# Allegro board du_main_proto.brd
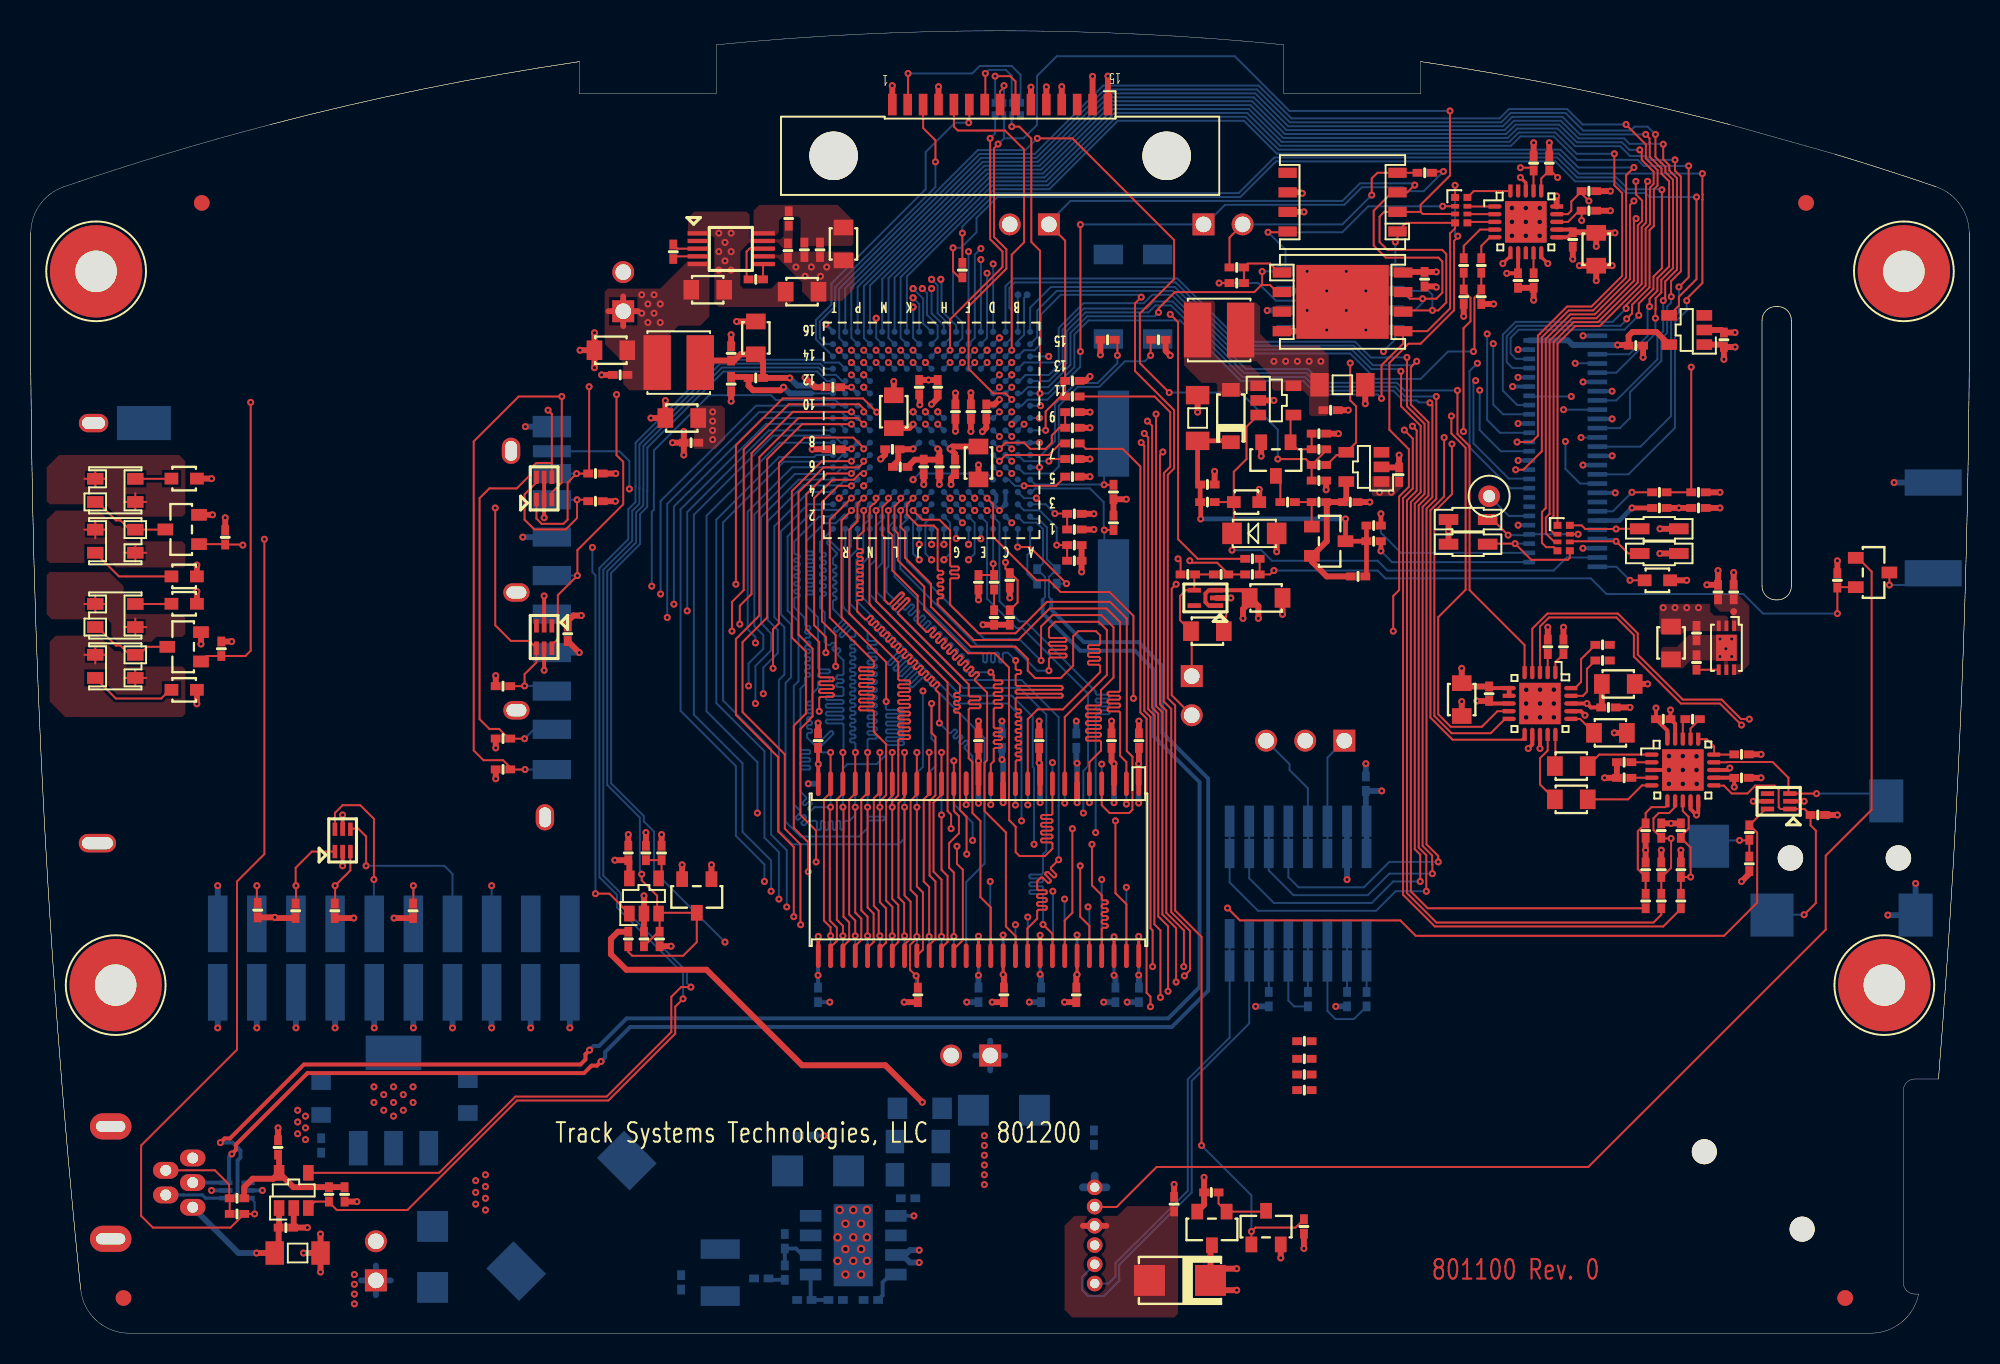
[diagram p0: board, top side]
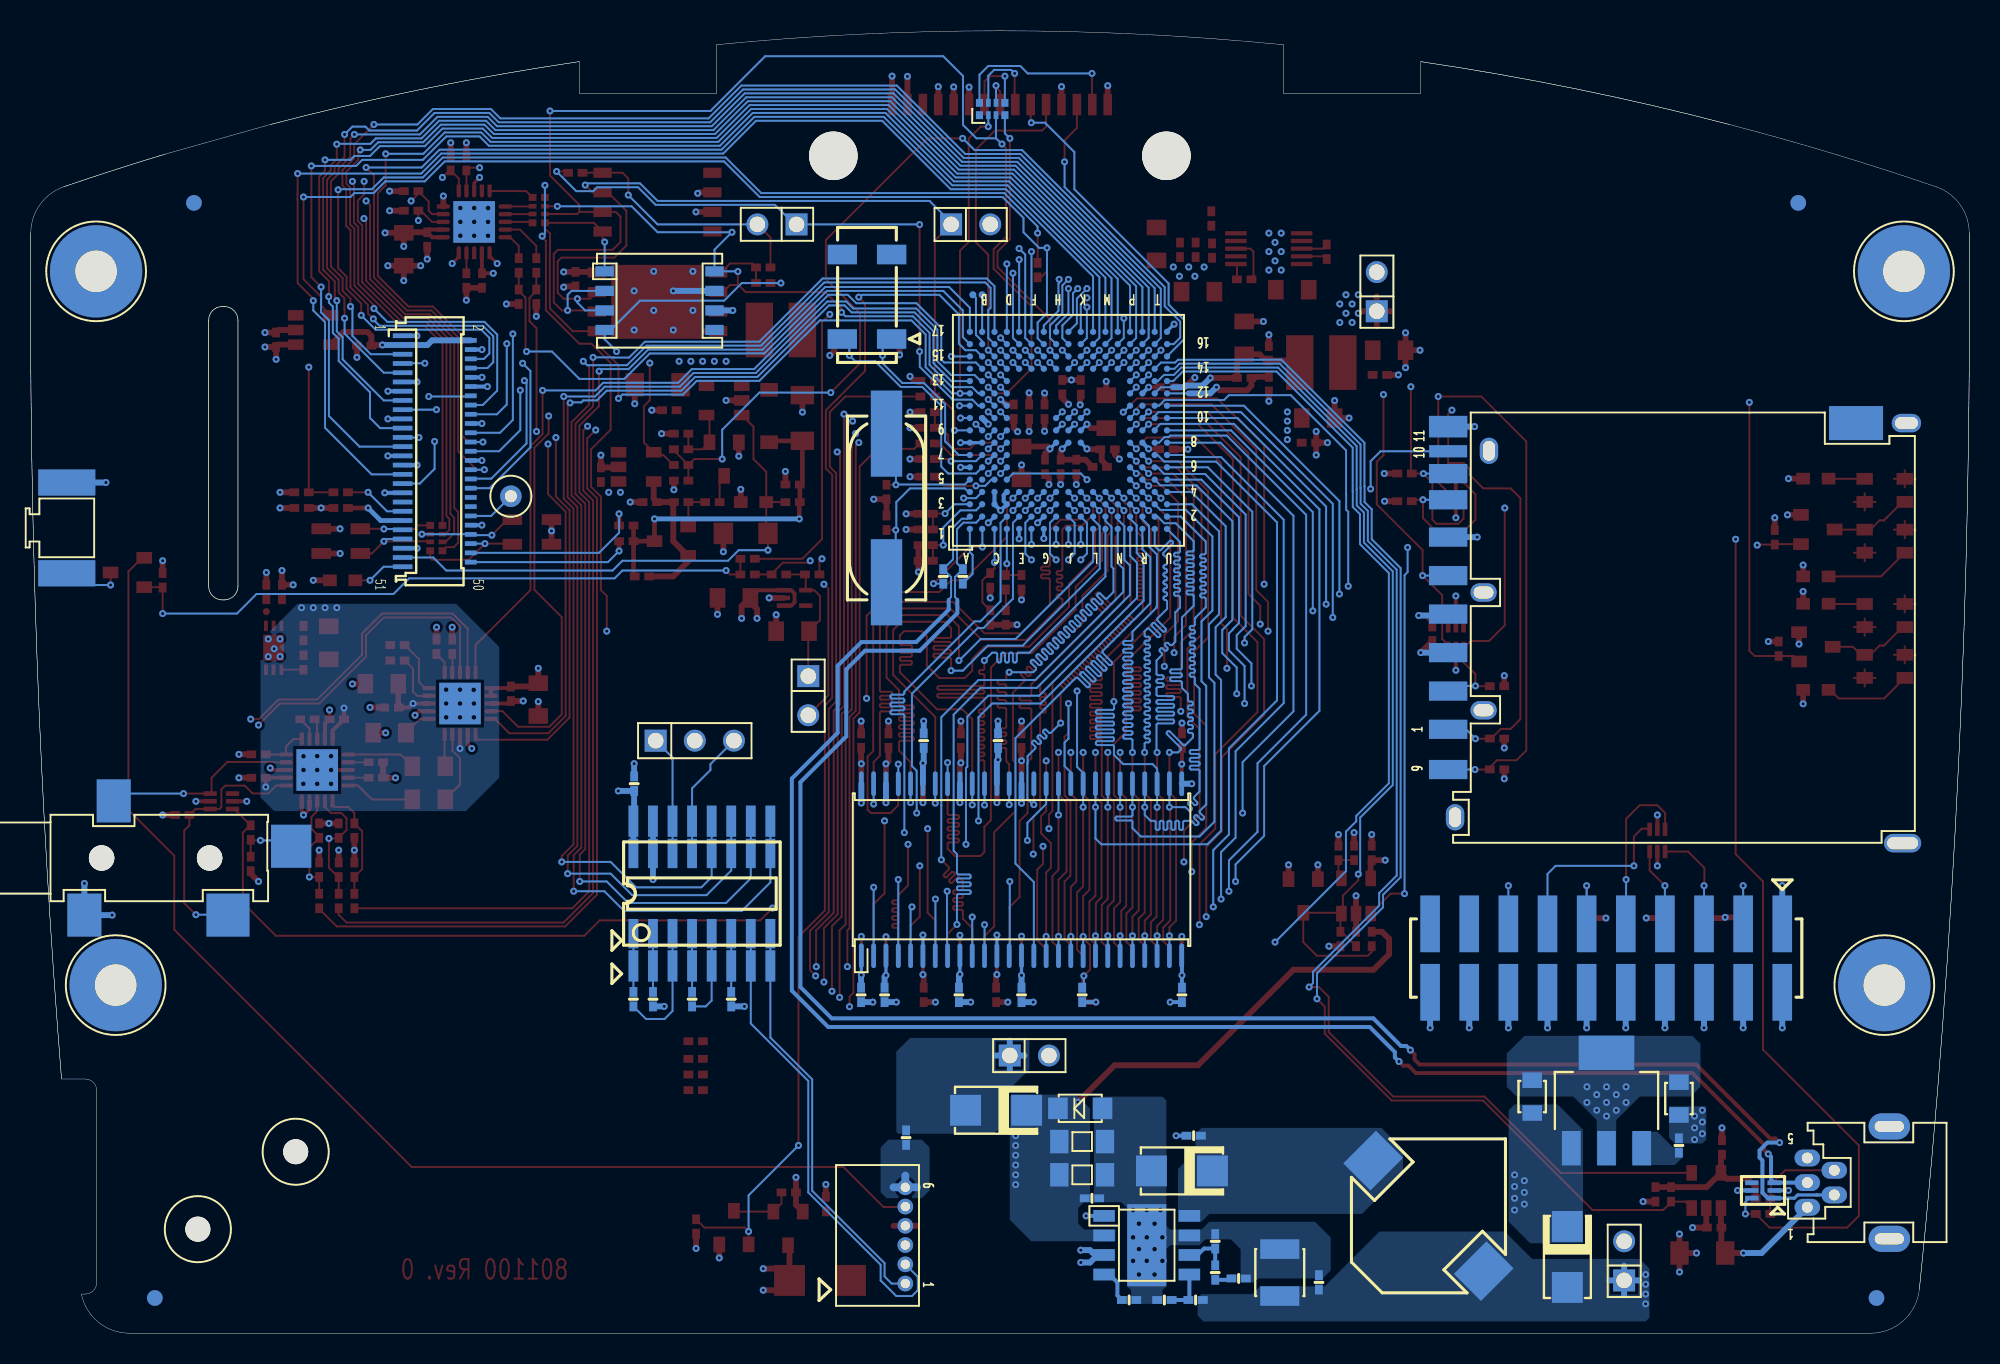
[diagram p1: board, bottom side, seen from below]

Outline 125.83 x 84.58 mm; copper layers: TOP, L2_GND, L3_PWR, L4_SIG, L5_GND, BOTTOM. Coordinates in mm from the lower left corner of the outline.
Outline path: 0,71.47 arc(0.6,73.3) 2.14,74.45 arc(5.4,75.54) 8.68,76.56 arc(12.1,77.56) 15.54,78.49 ; 0,71.47 arc(0.68,37.12) 3.23,2.85 ; 0,71.47 arc(0.68,37.12) 3.23,2.85 ; 3.23,2.85 arc(4.26,0.82) 6.39,0 119.43,0 arc(121.44,0.72) 122.54,2.54 122.31,2.54 arc(121.77,2.76) 121.55,3.3 121.55,15.75 arc(121.77,16.29) 122.31,16.51 123.83,16.51 ; 15.54,78.49 arc(25.52,80.81) 35.61,82.58 ; 15.54,78.49 arc(25.52,80.81) 35.61,82.58 ; 35.61,82.58 35.61,80.5 44.5,80.5 44.5,83.67 arc(62.91,84.58) 81.33,83.67 81.33,80.5 90.22,80.5 90.22,82.58 ; 90.22,82.58 arc(100.31,80.81) 110.28,78.49 ; 90.22,82.58 arc(100.31,80.81) 110.28,78.49 ; 110.28,78.49 117.14,76.56 ; 117.14,76.56 arc(120.42,75.54) 123.68,74.45 ; 117.14,76.56 arc(120.42,75.54) 123.68,74.45 ; 123.68,74.45 arc(125.23,73.3) 125.83,71.47 ; 125.83,71.47 arc(125.43,43.97) 123.83,16.51 ; 125.83,71.47 arc(125.43,43.97) 123.83,16.51 ; 112.38,65.79 112.38,48.51 arc(112.64,47.89) 113.27,47.62 113.4,47.62 arc(114.02,47.89) 114.28,48.51 114.28,65.79 arc(114.02,66.41) 113.4,66.68 113.27,66.68 arc(112.64,66.41) 112.38,65.79

## Design rules (mm)
net group USB: nets USB_DM USB_DP
net group DDR2_ADDR-CTRL: nets A2 A3 A4 A5 A6 A7 A8 A9 A10 A11 A13 A14 BA0 BA1 CAS RAS SDA10 SDCKE SDCS_NCS1 SDWE
net group DDR2_BYTE0: nets A0 D0 D1 D2 D3 D4 D5 D6 D7
net group DDR2_BYTE1: nets CFIOR_NBS1_NWR1 D8 D9 D10 D11 D12 D13 D14 D15
net group DDR2_BYTE2: nets A1 D16 D17 D18 D19 D20 D21 D22 D23
net group DDR2_BYTE3: nets CFIOW_NBS3_NWR3 D24 D25 D26 D27 D28 D29 D30 D31 SDCK

## Placement (name value [footprint] x y rotation side)
C1  0.1uF  [SMC_0402]  50.34 12.83 180 bottom
C2  1uF  [SMC_0402]  47.06 68.44 0 top
C3  1uF  [SMC_0402]  41.7 70.23 270 top
C4  10uF  [SMC_1206]  57.58 12.45 180 bottom
C5  0.1uF  [SMC_0402]  56.94 8.76 180 bottom
C6  10uF  [SMC_1206]  57.58 10.29 180 bottom
C7  100uF  [SMC_1210]  44.75 3.94 90 bottom
C8  0.1uF  [SMC_0402]  42.21 3.3 90 bottom
C9  0.01uF  [SMC_0402]  54.53 2.16 180 bottom
C10  10uF  [SMC_0805]  50.06 67.64 180 top
C11  10uF  [SMC_0805]  52.75 70.74 90 top
C12  10pF  [SMC_0402]  50.21 70.36 270 top
C13  0.1uF  [SMC_0402]  49.15 70.31 90 top
C14  10uF  [SMC_0805]  43.94 67.77 0 top
C15  10uF  [SMC_0805]  28.37 15.37 90 bottom
C16  10uF  [SMC_0805]  18.84 15.24 90 bottom
C17  47pF  [SMC_0402]  48.94 5.97 90 bottom
C18  680pF  [SMC_0402]  48.94 3.94 270 bottom
C19  0.1uF  [SMC_0402]  40.82 25.6 270 top
C20  0.1uF  [SMC_0402]  38.79 31.19 90 top
C21  0.1uF  [SMC_0402]  90.47 68.45 270 top
C22  0.01uF  [SMC_0402]  97.55 75.98 90 top
C23  0.01uF  [SMC_0402]  98.57 75.98 90 top
C24  0.01uF  [SMC_0402]  101.14 74.17 0 top
C25  10uF  [SMC_0805]  101.62 70.39 270 top
C26  1uF  [SMC_0402]  100.09 71.03 90 top
C27  0.01uF  [SMC_0402]  101.14 72.9 0 top
C28  1uF  [SMC_0402]  96.54 68.36 90 top
C29  0.1uF  [SMC_0402]  88.82 55.75 90 top
C30  0.1uF  [SMC_0402]  85.65 53.98 0 top
C31  0.1uF  [SMC_0402]  83.61 55.37 0 top
C32  0.1uF  [SMC_0402]  84.38 59.94 0 top
C33  10uF  [SMC_1206]  85.14 61.59 0 top
C34  10uF  [SMC_1206]  75.74 59.44 90 top
C35  0.1uF  [SMC_0402]  76.38 55.12 0 top
C36  DNP_22pF  [SMC_0402]  82.67 18.96 0 top
C37  DNP_390pF  [SMC_0402]  82.67 15.79 0 top
C38  0.1uF  [SMC_0402]  109.9 64.52 90 top
C39  0.1uF  [SMC_0402]  104.19 64.14 0 top
C40  0.1uF  [SMC_0402]  108.25 53.59 0 top
C41  0.1uF  [SMC_0402]  86.66 35.69 90 bottom
C42  0.1uF  [SMC_0402]  86.71 21.69 270 bottom
C43  0.1uF  [SMC_0402]  82.9 21.69 270 bottom
C44  0.1uF  [SMC_0402]  85.44 21.69 270 bottom
C45  0.1uF  [SMC_0402]  80.36 21.69 270 bottom
C46  0.1uF  [SMC_0402]  51.1 21.97 90 bottom
C47  0.1uF  [SMC_0402]  61.52 21.97 90 bottom
C48  0.1uF  [SMC_0402]  65.58 21.97 90 bottom
C49  0.1uF  [SMC_0402]  63.04 38.48 270 bottom
C50  0.1uF  [SMC_0402]  67.87 38.48 270 bottom
C51  0.1uF  [SMC_0402]  34.85 45.42 270 top
C52  0.1uF  [SMC_0402]  70.41 21.97 90 bottom
C53  0.1uF  [SMC_0402]  71.93 21.97 90 bottom
C54  0.1uF  [SMC_0402]  63.17 21.97 90 top
C55  0.1uF  [SMC_0402]  67.87 21.97 90 top
C56  0.1uF  [SMC_0402]  71.93 38.48 270 top
C57  0.1uF  [SMC_0402]  61.52 38.48 270 top
C58  0.1uF  [SMC_0402]  65.45 38.48 270 top
C59  0.1uF  [SMC_0402]  51.1 38.48 270 top
C60  0.1uF  [SMC_0402]  70.15 38.48 270 top
C61  0.1uF  [SMC_0402]  67.74 53.21 180 top
C62  0.1uF  [SMC_0402]  63.55 46.48 90 top
C63  10pF  [SMC_0402]  67.74 51.18 180 top
C64  4.7pF  [SMC_0402]  62.53 46.48 270 top
C65  470pF  [SMC_0402]  61.52 48.77 270 top
C66  18pF  [SMC_0402]  70.28 54.63 270 top
C67  18pF  [SMC_0402]  70.28 52.63 90 top
C68  DNP_18pF  [SMC_0402]  69.9 64.52 180 top
C69  0.1uF  [SMC_0402]  45.46 63.64 270 top
C70  DNP_18pF  [SMC_0402]  73.2 64.52 0 top
C71  0.1uF  [SMC_0402]  45.46 61.64 90 top
C72  10uF  [SMC_0805]  47.06 64.64 90 top
C73  0.1uF  [SMC_0402]  38.25 62.24 0 top
C74  10uF  [SMC_0805]  37.65 63.84 180 top
C75  0.1uF  [SMC_0402]  16.05 12.07 90 top
C76  DNP_10uF  [SMC_0805]  76.38 45.59 0 top
C77  0.1uF  [SMC_0402]  67.61 55.63 180 top
C78  10uF  [SMC_0805]  61.52 56.52 270 top
C79  0.1uF  [SMC_0402]  57.96 56.26 90 top
C80  0.1uF  [SMC_0402]  59.99 56.26 90 top
C81  0.1uF  [SMC_0402]  58.98 56.26 90 top
C82  0.1uF  [SMC_0402]  55.93 57.4 0 top
C83  DNP_10uF  [SMC_0805]  80.19 47.75 0 top
C84  10uF  [SMC_0805]  42.26 59.43 180 top
C85  0.1uF  [SMC_0402]  52.12 57.4 0 top
C86  0.1uF  [SMC_0402]  62.02 59.85 270 top
C87  0.1uF  [SMC_0402]  61.02 59.85 270 top
C88  10uF  [SMC_0805]  56.02 59.85 90 top
C89  0.1uF  [SMC_0402]  52.07 61.44 0 top
C90  0.1uF  [SMC_0402]  57.67 61.44 270 top
C91  0.1uF  [SMC_0402]  60.02 59.85 270 top
C92  0.1uF  [SMC_0402]  58.87 61.44 270 top
C93  0.1uF  [SMC_0402]  16.56 6.86 0 top
C94  10uF  [SMC_1206]  17.32 5.21 0 top
C95  1uF  [SMC_0402]  110.54 48.13 270 top
C96  10uF  [SMC_0805]  106.47 44.83 270 top
C97  0.1uF  [SMC_0402]  108.13 45.47 270 top
C98  10uF  [SMC_0805]  103.05 42.16 180 top
C99  10uF  [SMC_0805]  100 36.83 0 top
C100  10uF  [SMC_0805]  100 34.67 0 top
C101  1uF  [SMC_0402]  102.03 44.7 180 top
C102  1uF  [SMC_0402]  102.03 43.69 180 top
C103  0.01uF  [SMC_0402]  108.13 43.56 90 top
C104  1uF  [SMC_0402]  103.43 37.08 0 top
C105  1uF  [SMC_0402]  103.43 36.07 0 top
C111  10uF  [SMC_0805]  102.54 38.99 0 top
C112  1uF  [SMC_0402]  102.41 40.64 180 top
C113  0.1uF  [SMC_0402]  94.66 41.53 270 top
C114  10uF  [SMC_0805]  92.89 41.15 270 top
C124  1uF  [SMC_0402]  107.87 39.88 180 top
C125  1uF  [SMC_0402]  105.97 39.88 180 top
C126  1uF  [SMC_0402]  111.05 37.59 180 top
C127  1uF  [SMC_0402]  111.05 36.07 180 top
C128  47pF  [SMC_0402]  107.11 30.1 90 top
C129  47pF  [SMC_0402]  105.84 30.1 90 top
C130  47pF  [SMC_0402]  104.82 32.64 270 top
D1  B240A-13-F  [DO214AC_12]  63.17 14.48 0 bottom
D2  SMF18A-GS08  [DO219AB_21]  57.71 14.61 180 bottom
D3  B240A-13-F  [DO214AC_12]  26.08 4.95 270 bottom
D4  MBRA340  [DO214AC_12]  51.1 10.54 0 bottom
D5  BAT54C-7  [SOT23_321]  119.56 49.4 270 top
D6  BAT54S-7  [SOT23_123]  43.23 28.4 180 top
D7  B240A-13-F  [DO214AC_12]  74.6 3.43 180 top
D8  LR E6SF-V2AB-1-1  [LED_OSRAM_3P0M3P4_E6SF]  5.48 51.44 90 top
D9  LR E6SF-V2AB-1-1  [LED_OSRAM_3P0M3P4_E6SF]  5.48 54.74 270 top
D10  LR E6SF-V2AB-1-1  [LED_OSRAM_3P0M3P4_E6SF]  5.48 46.61 270 top
D11  LR E6SF-V2AB-1-1  [LED_OSRAM_3P0M3P4_E6SF]  5.48 43.31 90 top
D12  SMF18A-GS08  [DO219AB_21]  79.42 51.94 0 top
D13  MBR0530  [SOD_123_21]  77.9 59.56 90 top
D14  PESD5V0S1BA  [SOD323_BIDIR_12]  105.71 52.24 180 top
D15  PESD5V0S1BA  [SOD323_BIDIR_12]  93.3 52.84 0 top
D16  PESD5V0S1BA  [SOD323_BIDIR_12]  105.71 50.64 180 top
D17  PESD5V0S1BA  [SOD323_BIDIR_12]  93.3 51.24 0 top
J1  HEADER 2  [CON_1X2_R100SPC]  61.01 18.03 180 bottom
J3  DF13-6P  [CONN_HIROSE_DF13_6P_1P25DS]  69.06 3.22 270 bottom
J4  HEADER 2  [CON_1X2_R100SPC]  77.39 72.01 0 bottom
J5  Mates with SEI-115-02-G-S-E-AT  [CON15_SAMTEC_SEI_AT_MATE]  62.92 76.46 180 top
J6  FH23-51S-0.3SHW(06)  [HIROSE_FH23_51S_3MM_PTCH]  99.62 57.28 270 bottom
J7  HEADER 2  [CON_1X2_R100SPC]  38.45 67.64 90 bottom
J8  HEADER 2  [CON_1X2_R100SPC]  22.4 4.7 90 bottom
J9  HEADER 3  [CON_1X3_R100SPC]  82.73 38.48 180 bottom
J10  Reverse SD card socket  [CONN_SD_HIROSE_DM1B_DSF_PEJ]  33.37 46.08 90 bottom
J11  HEADER 2  [CON_1X2_R100SPC]  75.36 41.4 270 bottom
J12  2X10PTS COUDE  [MOLEX_71308_20P]  23.56 24.36 0 bottom
J13  HEADER 2  [CON_1X2_R100SPC]  64.82 72.01 180 bottom
J14  56579-0519  [CON_USB_56579-0519]  10.23 11.38 0 bottom
J15  3.5mm PHONOJACK  [CON_AUDIO_CUI_SJ-3524-SMT]  117.73 30.86 0 bottom
L1  10uH  [IND_PAN_ELLATV]  35.1 7.62 270 bottom
L2  4.7uH  [IND_MURATA_LQH44P_1515]  77.14 65.15 180 top
L3  4.7uH  [IND_MURATA_LQH44P_1515]  42.06 63.04 180 top
NOREF  -  [unnamed#2]  114.98 6.76 0 top
NOREF#2  -  [unnamed#3]  6.02 2.29 0 top
NOREF#3  -  [#3]  174.04 -74.17 0 top
NOREF#4  -  [unnamed#3]  117.78 2.29 0 top
NOREF#5  -  [#3]  3.61 -23.04 0 top
NOREF#6  -  [unnamed#3]  11.1 73.41 0 top
NOREF#7  -  [#3]  52.37 41.53 90 top
NOREF#8  -  [unnamed#3]  115.24 73.41 0 top
NOREF#9  -  [#3]  114.22 58.55 0 top
NOREF#10  -  [unnamed#3]  6.02 2.29 180 bottom
NOREF#11  -  [unnamed#3]  115.24 73.41 180 bottom
NOREF#12  -  [unnamed#3]  117.78 2.29 180 bottom
NOREF#13  -  [unnamed#3]  11.1 73.41 180 bottom
Q1  DNP_FDV304P  [SOT23_123]  76.67 6.8 180 top
Q2  VN2110K1  [SOT23_123]  80.19 6.86 0 top
Q3  VN2110K1  [SOT23_123]  9.83 52.2 90 top
Q4  VN2110K1  [SOT23_123]  9.95 44.58 90 top
Q5  DNP_FDV304P  [SOT23_123]  84.25 51.44 270 top
Q6  DNP_VN2110K1  [SOT23_123]  80.82 56.77 180 top
R1  10K  [SMR_0402]  50.21 2.16 180 bottom
R2  100K  [SMR_0402]  51.23 70.36 90 top
R3  0  [SMR_0402]  18.84 12.19 270 bottom
R4  1.87K  [SMR_0402]  52.25 2.16 180 bottom
R5  200K  [SMR_0402]  49.2 72.39 270 top
R6  10K  [SMR_0402]  117.27 48.9 90 top
R7  0  [SMR_0402]  74.22 8.38 90 top
R8  31.6K  [SMR_0402]  47.42 3.56 0 bottom
R9  0  [SMR_0402]  69.01 12.7 90 bottom
R10  100K  [SMR_0402]  38.79 25.6 270 top
R11  33K  [SMR_0402]  39.8 25.6 90 top
R12  100K  [SMR_0402]  39.93 31.19 270 top
R13  100K  [SMR_0402]  40.94 31.19 90 top
R14  0  [SMR_0402]  90.48 75.36 180 top
R15  0  [SMR_0402]  93.01 69.34 90 top
R16  0  [SMR_0402]  94.16 69.34 90 top
R17  10K  [SMR_0402]  94.16 67.31 90 top
R18  10K  [SMR_0402]  93.01 67.31 90 top
R19  10K  [SMR_0402]  97.55 68.36 90 top
R20  10K  [SMR_0402]  76.63 9.14 180 top
R21  10K  [SMR_0402]  82.64 6.93 90 top
R22  62  [SMR_0603]  9.95 49.15 0 top
R23  10K  [SMR_0402]  12.62 51.69 270 top
R24  62  [SMR_0603]  9.95 55.5 0 top
R25  62  [SMR_0603]  9.95 47.37 0 top
R26  10K  [SMR_0402]  12.37 44.45 270 top
R27  62  [SMR_0603]  9.95 41.78 0 top
R28  DNP_10K  [SMR_0402]  83.61 53.98 0 top
R29  DNP_0  [SMR_0402]  83.61 56.39 0 top
R30  DNP_35.7K  [SMR_0402]  81.58 53.98 0 top
R31  DNP_0  [SMR_0402]  86.15 49.15 180 top
R32  0  [SMR_0402]  83.61 57.4 180 top
R33  DNP_10K  [SMR_0402]  83.61 58.42 180 top
R34  100  [SMR_0402]  87.17 52.45 0 top
R35  100  [SMR_0402]  87.17 51.44 0 top
R36  DNP_0  [SMR_0402]  76.38 53.98 0 top
R37  62  [SMR_0603]  78.92 53.98 0 top
R38  62  [SMR_0603]  105.59 48.9 0 top
R39  DNP_59K  [SMR_0402]  82.67 17.82 0 top
R40  DNP_2.61K  [SMR_0402]  82.67 16.8 0 top
R41  0  [SMR_0402]  60.47 69.04 270 top
R42  10K  [SMR_0402]  108.25 54.61 180 top
R43  0  [SMR_0402]  105.71 54.61 180 top
R44  0  [SMR_0402]  105.71 53.59 180 top
R45  470K  [SMR_0402]  57.58 21.97 90 bottom
R46  68K  [SMR_0402]  30.65 38.62 0 top
R47  68K  [SMR_0402]  30.65 36.62 0 top
R48  68K  [SMR_0402]  36.65 55.83 180 top
R49  10K  [SMR_0402]  30.65 42.02 0 top
R50  68K  [SMR_0402]  36.65 54.03 180 top
R51  0  [SMR_0402]  79.3 50.29 180 top
R52  470K  [SMR_0402]  57.58 21.97 90 top
R53  68K  [SMR_0402]  14.73 27.48 90 top
R54  68K  [SMR_0402]  17.19 27.43 90 top
R55  68K  [SMR_0402]  19.73 27.43 90 top
R56  0  [SMR_0402]  67.61 57.79 0 top
R57  68K  [SMR_0402]  24.81 27.43 90 top
R58  0  [SMR_0402]  67.74 52.2 180 top
R59  1K  [SMR_0402]  67.61 61.85 0 top
R60  0  [SMR_0402]  67.61 60.83 0 top
R61  0  [SMR_0402]  63.55 48.9 90 top
R62  6.8K  [SMR_0402]  67.74 50.17 0 top
R63  1.5K  [SMR_0402]  62.53 48.77 270 top
R64  39  [SMR_0402]  66.6 49.15 90 bottom
R65  39  [SMR_0402]  65.33 49.15 90 bottom
R66  0  [SMR_0402]  47.06 62.04 0 top
R67  0  [SMR_0402]  20.37 9.02 90 top
R68  10K  [SMR_0402]  19.35 9.02 90 top
R69  10K  [SMR_0402]  13.38 8.76 0 top
R70  DNP_0  [SMR_0402]  75.11 49.28 180 top
R71  1K  [SMR_0402]  67.61 56.77 180 top
R72  10K  [SMR_0402]  67.61 58.8 180 top
R73  DNP_100K  [SMR_0402]  77.26 49.28 180 top
R74  0  [SMR_0402]  56.44 56.26 0 top
R75  0  [SMR_0402]  42.86 57.83 180 top
R76  DNP_0  [SMR_0402]  79.3 49.28 180 top
R77  DNP_0  [SMR_0402]  67.61 59.82 0 top
R78  10K  [SMR_0402]  13.38 7.75 0 top
R79  0  [SMR_0402]  109.52 48.13 270 top
R80  1K  [SMR_0402]  99.49 44.58 270 top
R82  1.87K  [SMR_0402]  105.84 32.64 90 top
R83  1.87K  [SMR_0402]  107.11 32.64 90 top
R84  0  [SMR_0402]  98.47 44.58 90 top
R85  39  [SMR_0402]  104.82 28.07 90 top
R86  39  [SMR_0402]  105.84 28.07 90 top
R87  39  [SMR_0402]  107.11 28.07 90 top
R88  1.87K  [SMR_0402]  104.82 30.1 270 top
R89  10K  [SMR_0402]  116 33.66 180 top
R90  0  [SMR_0402]  111.55 32.51 90 top
R91  100K  [SMR_0402]  111.55 30.48 90 top
R92  DNP_0  [SMR_0402]  78.28 69.22 0 top
R93  DNP_0  [SMR_0402]  78.28 68.2 0 top
REFSST  -  [unnamed]  120.32 22.61 0 top
RN1  0  [RN4_YC124_YAGEO]  92.85 72.93 270 top
RN2  0  [RN4_YC124_YAGEO]  63.42 79.5 180 bottom
RN3  0  [RN4_YC124_YAGEO]  99.5 51.64 270 top
SW1  KSS221GLFS  [SWX_CK_KSS221GLFS]  123.49 52.3 270 bottom
T1  TP-VIA19  [TP_031]  94.66 54.36 0 top
TP1  TP-VIA19  [TP-018-RND]  54.07 62.24 90 top
TP2  TP-VIA19  [TP-018-RND]  53.27 63.04 90 top
TP3  TP-VIA19  [TP-018-RND]  54.88 65.91 90 top
TP4  TP-VIA19  [TP-018-RND]  60.87 50.23 90 top
TP5  TP-VIA19  [TP-018-RND]  61.27 54.23 90 top
TP6  TP-VIA19  [TP-018-RND]  60.47 54.23 90 top
TP7  TP-VIA19  [TP-018-RND]  60.47 53.43 90 top
TP8  TP-VIA19  [TP-018-RND]  54.07 63.04 90 top
TP9  TP-VIA19  [TP-018-RND]  59.27 51.23 90 top
TP10  TP-VIA19  [TP-018-RND]  59.27 50.23 90 top
TP11  TP-VIA19  [TP-018-RND]  58.07 53.43 90 top
TP12  TP-VIA19  [TP-018-RND]  58.47 51.23 90 top
TP13  TP-VIA19  [TP-018-RND]  58.47 50.23 90 top
TP14  TP-VIA19  [TP-018-RND]  52.47 63.84 90 top
TP15  TP-VIA19  [TP-018-RND]  57.67 51.23 90 top
TP16  TP-VIA19  [TP-018-RND]  57.67 50.23 90 top
TP17  TP-VIA19  [TP-018-RND]  54.07 61.44 90 top
TP18  TP-VIA19  [TP-018-RND]  57.27 66.64 90 top
TP19  TP-VIA19  [TP-018-RND]  57.27 67.24 90 top
TP20  TP-VIA19  [TP-018-RND]  57.27 59.83 90 top
TP21  TP-VIA19  [TP-018-RND]  58.07 59.83 90 top
TP22  TP-VIA19  [TP-018-RND]  57.87 67.84 90 top
TP23  TP-VIA19  [TP-018-RND]  57.27 67.84 90 top
TP24  TP-VIA19  [TP-018-RND]  64.07 67.44 90 bottom
TP25  TP-VIA19  [TP-018-RND]  66.08 63.44 90 top
TP26  TP-VIA19  [TP-018-RND]  63.67 63.04 90 top
TP27  TP-VIA19  [TP-018-RND]  62.87 63.04 90 top
TP28  TP-VIA19  [TP-018-RND]  63.67 62.24 90 top
TP30  TP-VIA19  [TP-018-RND]  58.07 63.04 90 top
TP31  TP-VIA19  [TP-018-RND]  58.47 68.44 90 top
TP32  TP-VIA19  [TP-018-RND]  52.47 54.23 90 top
TP33  TP-VIA19  [TP-018-RND]  54.07 55.03 90 top
TP39  TP-VIA19  [TP-018-RND]  59.67 54.23 90 top
TP41  TP-VIA19  [TP-018-RND]  58.47 67.84 90 top
TP42  TP-VIA19  [TP-018-RND]  58.87 59.83 0 top
TP43  TP-VIA19  [TP-018-RND]  59.07 68.44 90 top
TP44  TP-VIA19  [TP-018-RND]  62.07 53.43 90 top
TP45  TP-VIA19  [TP-018-RND]  62.87 64.64 90 top
TP46  TP-VIA19  [TP-018-RND]  62.07 63.84 90 top
TP47  TP-VIA19  [TP-018-RND]  60.87 51.23 90 top
TP48  TP-VIA19  [TP-018-RND]  61.27 53.43 90 top
TP50  TP-VIA19  [TP-018-RND]  64.67 67.44 90 bottom
TP53  TP-VIA19  [TP-018-RND]  65.28 54.23 90 top
TP54  TP-VIA19  [TP-018-RND]  57.27 55.43 90 top
TP55  TP-VIA19  [TP-018-RND]  110.54 46.86 180 top
U1  TPS54231D  [SOIC8_197X157_050_EPAD]  53.39 5.72 270 bottom
U2  LT1963EST-3.3  [SOT223_1234]  23.54 15.11 180 bottom
U3  TPS60500DGS  [MSOP10_R194W_R13L_R0196PTCH]  45.47 70.43 270 top
U4  MCP6541T-E/OT  [SOT23_5P]  39.8 28.4 0 top
U5  AT45DB642D_CNU  [CASON8_6P1M8P1_P1R27]  85.15 73.46 90 top
U6  DNP_SST25VF064C-80-4I-Q2AE  [WSON8_6P1M8P1_P1R27_EP4P8M6P0]  85.15 66.98 270 top
U7  TSC2006  [QFN20_4P1M4P1_P5M_EP_2P7]  97.05 72.17 0 top
U8  DNP_MCP1804T-C002I/OT  [SOT23_5P]  86.54 56.26 90 top
U9  TPS61040  [SOT23_5P]  80.82 60.58 270 top
U10  MCP1804T-5002I/OT  [SOT23_5P]  107.49 65.15 90 top
U11  ADM3202-SOIC16W  [SOIC16_R41W_R41L_R050PTCH]  82.26 28.55 180 bottom
U12  MT48LC16M16A2P-75IT  [TSOP54_22P3M10P3_P8MM]  61.52 30.1 180 bottom
U13  AT91SAM9RL-LFBGA217  [LFBGA217_15X15_0P8MM]  58.47 58.63 90 bottom
U14  MT48LC16M16A2P-75IT  [TSOP54_22P3M10P3_P8MM]  61.52 30.1 180 top
U15  3304A  [SC89_6P]  20.24 32 0 top
U16  3304A  [SC89_6P]  33.32 54.86 0 top
U17  3304A  [SC89_6P]  33.32 45.21 180 top
U18  0504A  [SC89_6P]  13.38 9.27 90 bottom
U19  DNP_BH12PB1WHFV  [SC89_5P]  76.25 47.75 90 top
U20  TPS2051BDBVR  [SOT23_5P]  17.07 9.27 0 top
U21  BH33MA3WHFV  [HVSOF6_1P7M2P8_P5MM_EP_1P4M1P7]  110.07 44.51 180 top
U22  PCM1774  [QFN20_4P1M4P1_P5M_EP_2P7]  97.97 40.89 270 top
U23  TPA6130A2  [QFN20_4P1M4P1_P5M_EP_2P7]  107.24 36.58 0 top
U24  ADM3202-SOIC16N  [SOIC16_R23W_R4L_R05LS]  82.26 28.55 180 bottom
U25  3304A  [SC89_6P]  113.46 34.54 90 top
U26  AT45DB642D_CNU  [CASON8_6P1M8P1_P1R27]  85.01 67.06 270 bottom
UNK*  -  [unnamed]  4.24 68.96 0 top
UNK*#2  -  [unnamed]  121.59 68.96 0 top
UNK*#3  -  [unnamed]  5.51 22.61 0 top
UNK*#4  -  [unnamed#2]  108.63 11.79 0 top
Y1  12MHz  [XTAL_HC49U_SM_R16H]  70.28 48.77 90 bottom
Y2  CM200S 32.768kHz  [XTAL_CM200S]  71.55 67.31 90 bottom

## Library data of the parts
C1-C105 C111-C114 C124-C130 = CAP_NP
D1 D3 D4 D7 = DIODE SCHOTTKY_2
D2 D12 = DIODE TVS
D5 = BAT54C/SOT
D6 = DUALDIODE2
D8-D11 = LED_LYE6SF
D13 = DIODE SCHOTTKY
D14-D17 = DIODE BI-DIR TRIG
J1 J4 J7 J8 J11 J13 = HEADER 2
J3 = HEADER 6
J5 = HEADER 15/SM
J6 = CON50_1
J9 = HEADER 3
J10 = FPS009-3202
J12 = 2X10PTS CMS HE10 DROIT
J14 = USB_OTG_AB_1
J15 = PHONOJACK STEREO-14
L1-L3 = INDUCTOR
NOREF REFSST = -: Tolerance: TOLERANCE; User Part Number: PART NUMBER
Q1 Q5 = FDV304P
Q2-Q4 Q6 = 406-07-00006
R1-R80 R82-R93 = RES_0
RN1-RN3 = RES_ISO8: Tolerance: TOLERANCE; User Part Number: PART NUMBER
SW1 = SW_PB_SPST
T1 = TP-VIA19_0: Tolerance: TOLERANCE; User Part Number: PART NUMBER
TP1-TP28 TP30-TP33 TP39 TP41-TP48 TP50 TP53-TP55 = TP-VIA19_0
U1 = TPS5450DDA_0
U2 = LT1963AEQ-3_1.3
U3 = TPS60500 MSOP10
U4 = MCP6541T-E/OT_0
U5 U26 = AT45DB642D_CNU
U6 = SST25VF064C-80-4I-Q2AE
U7 = TSC2006_0
U8 U10 = MCP1804T-C002I/OT
U9 = TPS61040
U11 U24 = ADM3202-SOIC16N
U12 U14 = MT48LC16M16A2TG
U13 = AT91SAM9RL-LFBGA217_0: User Part Number: PART NUMBER; Tolerance: TOLERANCE
U15-U18 U25 = uClamp3304A
U19 = BH30NB1WHFV
U20 = TPS2051B
U21 = BH33MA3WHFV_0
U22 = PCM1774
U23 = TPA6130A2_1
UNK* UNK*#2-UNK*#4 = -: User Part Number: PART NUMBER; Tolerance: TOLERANCE
Y1 = HC49SUB-12MHZ-20pF
Y2 = CM200S 32.768kHz

## Footprints (pads in the part's own frame, mm; a bottom-side part is the same pattern mirrored in y, then rotated)
CASON8_6P1M8P1_P1R27
  rect 0.66x1.194 smd: 1(-1.905,-3.565) 2(-0.635,-3.565) 3(0.635,-3.565) 4(1.905,-3.565) 5(1.905,3.565) 6(0.635,3.565) 7(-0.635,3.565) 8(-1.905,3.565)
CON15_SAMTEC_SEI_AT_MATE
  round 3.15 hole 3.175 unplated: (-10.81,0) (10.81,0)
  rect 0.559x1.397 smd: 1(7,-3.328) 2(6,-3.328) 3(5,-3.328) 4(4,-3.328) 5(3,-3.328) 6(2,-3.328) 7(1,-3.328) 8(0,-3.328) 9(-1,-3.328) 10(-2,-3.328) 11(-3,-3.328) 12(-4,-3.328) 13(-5,-3.328) 14(-6,-3.328) 15(-7,-3.328)
CON_1X2_R100SPC
  rect 1.422x1.422 hole 1.016: 1(-1.27,0)
  round 1.422 hole 1.016: 2(1.27,0)
CON_1X3_R100SPC
  rect 1.422x1.422 hole 1.016: 1(-2.54,0)
  round 1.422 hole 1.016: 2(0,0) 3(2.54,0)
CON_AUDIO_CUI_SJ-3524-SMT
  round 1.651 hole 1.702 unplated: (-3.505,0) (3.505,0)
  rect 2.21x2.794 smd: 1(4.623,3.708) 3(2.718,-3.708)
  rect 2.794x2.794 smd: 2(-4.699,3.708)
  rect 2.616x2.794 smd: 4(-8.801,-0.762)
CON_USB_56579-0519
  oval 1.651x1.092 hole 0.711: 1(0.275,3.2) 2(-1.475,2.4) 3(0.275,1.6) 4(-1.475,0.8) 5(0.275,0)
  oval 2.692x1.702 hole 1.905x0.711: G1(-5.05,-2.05) G2(-5.05,5.25)
CONN_HIROSE_DF13_6P_1P25DS
  round 1.016 hole 0.61: 1(0,0) 2(-1.25,0) 3(-2.5,0) 4(-3.75,0) 5(-5,0) 6(-6.25,0)
CONN_SD_HIROSE_DM1B_DSF_PEJ
  oval 1.194x2.413 hole 0.787x2.007: (-14.25,-29.05)
  oval 1.702x1.194 hole 1.295x0.787: (-12.57,0) (11.23,-2.2)
  oval 1.194x1.702 hole 0.787x1.295: (-5.62,-1.85) (2.03,-1.85)
  oval 1.194x1.905 hole 0.787x1.499: (13.03,-29.3)
  rect 1.245x2.489 smd: 1(-6.858,0.45) 2(-4.375,0.45) 3(-1.875,0.45) 4(0.625,0.45) 5(3.125,0.45) 6(5.625,0.45) 7(8.05,0.45) 8(9.75,0.45) 9(-9.47,0.45)
  rect 0.787x2.464 smd: 10(11.2,0.45)
  rect 1.397x2.489 smd: 11(12.8,0.45)
  rect 2.21x3.505 smd: 12(13.03,-26.03)
DO214AC_12
  rect 2.007x2.007 smd: 1(-1.981,0) 2(1.981,0)
DO219AB_21
  rect 1.27x1.397 smd: 1(1.448,0) 2(-1.448,0)
HIROSE_FH23_51S_3MM_PTCH
  rect 0.305x1.27 smd: 1(-7.501,-2.075) 3(-6.901,-2.075) 5(-6.299,-2.075) 7(-5.7,-2.075) 9(-5.1,-2.075) 11(-4.501,-2.075) 13(-3.899,-2.075) 15(-3.299,-2.075) 17(-2.7,-2.075) 19(-2.101,-2.075) 21(-1.501,-2.075) 23(-0.899,-2.075) 25(-0.3,-2.075) 27(0.3,-2.075) 29(0.899,-2.075) 31(1.501,-2.075) 33(2.101,-2.075) 35(2.7,-2.075) 37(3.299,-2.075) 39(3.899,-2.075) 41(4.501,-2.075) 43(5.1,-2.075) 45(5.7,-2.075) 47(6.299,-2.075) 49(6.901,-2.075) 51(7.501,-2.075)
  rect 0.305x0.762 smd: 2(-7.201,2.349) 4(-6.599,2.349) 6(-5.999,2.349) 8(-5.4,2.349) 10(-4.801,2.349) 12(-4.201,2.349) 14(-3.599,2.349) 16(-3,2.349) 18(-2.4,2.349) 20(-1.801,2.349) 22(-1.199,2.349) 24(-0.599,2.349) 26(0,2.349) 28(0.599,2.349) 30(1.199,2.349) 32(1.801,2.349) 34(2.4,2.349) 36(3,2.349) 38(3.599,2.349) 40(4.201,2.349) 42(4.801,2.349) 44(5.4,2.349) 46(5.999,2.349) 48(6.599,2.349) 50(7.201,2.349)
HVSOF6_1P7M2P8_P5MM_EP_1P4M1P7
  rect 0.254x0.686 smd: 1(-0.5,-1.425) 2(0,-1.425) 3(0.5,-1.425) 4(0.5,1.425) 5(0,1.425) 6(-0.5,1.425)
  rect 1.346x1.702 smd: 7(0,0)
IND_MURATA_LQH44P_1515
  rect 1.778x3.556 smd: 1(-1.397,0) 2(1.397,0)
IND_PAN_ELLATV
  rect 2.489x2.997 smd rot 135: 1(-3.589,-3.589) 2(3.589,3.589)
LED_OSRAM_3P0M3P4_E6SF
  rect 0.762x1.067 smd: A1(-0.75,-1.3) A2(-0.75,1.3) A3(0.75,1.3) C(0.75,-1.3)
LFBGA217_15X15_0P8MM
  round 0.406 smd: A1(-6.4,6.4) A2(-5.6,6.4) A3(-4.8,6.4) A4(-4,6.4) A5(-3.2,6.4) A6(-2.4,6.4) A7(-1.6,6.4) A8(-0.8,6.4) A9(0,6.4) A10(0.8,6.4) A11(1.6,6.4) A12(2.4,6.4) A13(3.2,6.4) A14(4,6.4) A15(4.8,6.4) A16(5.6,6.4) A17(6.4,6.4) B1(-6.4,5.6) B2(-5.6,5.6) B3(-4.8,5.6) B4(-4,5.6) B5(-3.2,5.6) B6(-2.4,5.6) B7(-1.6,5.6) B8(-0.8,5.6) B9(0,5.6) B10(0.8,5.6) B11(1.6,5.6) B12(2.4,5.6) B13(3.2,5.6) B14(4,5.6) B15(4.8,5.6) B16(5.6,5.6) B17(6.4,5.6) C1(-6.4,4.8) C2(-5.6,4.8) C3(-4.8,4.8) C4(-4,4.8) C5(-3.2,4.8) C6(-2.4,4.8) C7(-1.6,4.8) C8(-0.8,4.8) C9(0,4.8) C10(0.8,4.8) C11(1.6,4.8) C12(2.4,4.8) C13(3.2,4.8) C14(4,4.8) C15(4.8,4.8) C16(5.6,4.8) C17(6.4,4.8) D1(-6.4,4) D2(-5.6,4) D3(-4.8,4) D4(-4,4) D5(-3.2,4) D6(-2.4,4) D7(-1.6,4) D8(-0.8,4) D9(0,4) D10(0.8,4) D11(1.6,4) D12(2.4,4) D13(3.2,4) D14(4,4) D15(4.8,4) D16(5.6,4) D17(6.4,4) E1(-6.4,3.2) E2(-5.6,3.2) E3(-4.8,3.2) E4(-4,3.2) E14(4,3.2) E15(4.8,3.2) E16(5.6,3.2) E17(6.4,3.2) F1(-6.4,2.4) F2(-5.6,2.4) F3(-4.8,2.4) F4(-4,2.4) F14(4,2.4) F15(4.8,2.4) F16(5.6,2.4) F17(6.4,2.4) G1(-6.4,1.6) G2(-5.6,1.6) G3(-4.8,1.6) G4(-4,1.6) G14(4,1.6) G15(4.8,1.6) G16(5.6,1.6) G17(6.4,1.6) H1(-6.4,0.8) H2(-5.6,0.8) H3(-4.8,0.8) H4(-4,0.8) H8(-0.8,0.8) H9(0,0.8) H10(0.8,0.8) H14(4,0.8) H15(4.8,0.8) H16(5.6,0.8) H17(6.4,0.8) J1(-6.4,0) J2(-5.6,0) J3(-4.8,0) J4(-4,0) J8(-0.8,0) J9(0,0) J10(0.8,0) J14(4,0) J15(4.8,0) J16(5.6,0) J17(6.4,0) K1(-6.4,-0.8) K2(-5.6,-0.8) K3(-4.8,-0.8) K4(-4,-0.8) K8(-0.8,-0.8) K9(0,-0.8) K10(0.8,-0.8) K14(4,-0.8) K15(4.8,-0.8) K16(5.6,-0.8) K17(6.4,-0.8) L1(-6.4,-1.6) L2(-5.6,-1.6) L3(-4.8,-1.6) L4(-4,-1.6) L14(4,-1.6) L15(4.8,-1.6) L16(5.6,-1.6) L17(6.4,-1.6) M1(-6.4,-2.4) M2(-5.6,-2.4) M3(-4.8,-2.4) M4(-4,-2.4) M14(4,-2.4) M15(4.8,-2.4) M16(5.6,-2.4) M17(6.4,-2.4) N1(-6.4,-3.2) N2(-5.6,-3.2) N3(-4.8,-3.2) N4(-4,-3.2) N14(4,-3.2) N15(4.8,-3.2) N16(5.6,-3.2) N17(6.4,-3.2) P1(-6.4,-4) P2(-5.6,-4) P3(-4.8,-4) P4(-4,-4) P5(-3.2,-4) P6(-2.4,-4) P7(-1.6,-4) P8(-0.8,-4) P9(0,-4) P10(0.8,-4) P11(1.6,-4) P12(2.4,-4) P13(3.2,-4) P14(4,-4) P15(4.8,-4) P16(5.6,-4) P17(6.4,-4) R1(-6.4,-4.8) R2(-5.6,-4.8) R3(-4.8,-4.8) R4(-4,-4.8) R5(-3.2,-4.8) R6(-2.4,-4.8) R7(-1.6,-4.8) R8(-0.8,-4.8) R9(0,-4.8) R10(0.8,-4.8) R11(1.6,-4.8) R12(2.4,-4.8) R13(3.2,-4.8) R14(4,-4.8) R15(4.8,-4.8) R16(5.6,-4.8) R17(6.4,-4.8) T1(-6.4,-5.6) T2(-5.6,-5.6) T3(-4.8,-5.6) T4(-4,-5.6) T5(-3.2,-5.6) T6(-2.4,-5.6) T7(-1.6,-5.6) T8(-0.8,-5.6) T9(0,-5.6) T10(0.8,-5.6) T11(1.6,-5.6) T12(2.4,-5.6) T13(3.2,-5.6) T14(4,-5.6) T15(4.8,-5.6) T16(5.6,-5.6) T17(6.4,-5.6) U1(-6.4,-6.4) U2(-5.6,-6.4) U3(-4.8,-6.4) U4(-4,-6.4) U5(-3.2,-6.4) U6(-2.4,-6.4) U7(-1.6,-6.4) U8(-0.8,-6.4) U9(0,-6.4) U10(0.8,-6.4) U11(1.6,-6.4) U12(2.4,-6.4) U13(3.2,-6.4) U14(4,-6.4) U15(4.8,-6.4) U16(5.6,-6.4) U17(6.4,-6.4)
MOLEX_71308_20P
  rect 1.27x3.683 smd: 1(-11.43,-2.223) 2(-11.43,2.223) 3(-8.89,-2.223) 4(-8.89,2.223) 5(-6.35,-2.223) 6(-6.35,2.223) 7(-3.81,-2.223) 8(-3.81,2.223) 9(-1.27,-2.223) 10(-1.27,2.223) 11(1.27,-2.223) 12(1.27,2.223) 13(3.81,-2.223) 14(3.81,2.223) 15(6.35,-2.223) 16(6.35,2.223) 17(8.89,-2.223) 18(8.89,2.223) 19(11.43,-2.223) 20(11.43,2.223)
MSOP10_R194W_R13L_R0196PTCH
  rect 0.279x1.397 smd: 1(-0.998,-2.134) 2(-0.5,-2.134) 3(0,-2.134) 4(0.5,-2.134) 5(1.001,-2.134) 6(1.001,2.134) 7(0.5,2.134) 8(0,2.134) 9(-0.5,2.134) 10(-0.998,2.134)
QFN20_4P1M4P1_P5M_EP_2P7
  custom 0.85x0.28 smd: 1(-2,1) 2(-2,0.5) 3(-2,0) 4(-2,-0.5) 5(-2,-1) 11(2,-1) 12(2,-0.5) 13(2,0) 14(2,0.5) 15(2,1)
  custom 0.28x0.85 smd: 6(-1,-2) 7(-0.5,-2) 8(0,-2) 9(0.5,-2) 10(1,-2) 16(1,2) 17(0.5,2) 18(0,2) 19(-0.5,2) 20(-1,2)
  rect 2.692x2.692 smd: 21(0,0)
RN4_YC124_YAGEO
  rect 0.457x0.508 smd: 1(-0.825,-0.4) 4(0.825,-0.4) 5(0.825,0.4) 8(-0.825,0.4)
  rect 0.305x0.508 smd: 2(-0.25,-0.4) 3(0.25,-0.4) 6(0.25,0.4) 7(-0.25,0.4)
SC89_5P
  rect 0.305x0.864 smd: 1(-0.5,-0.725) 2(0,-0.725) 3(0.5,-0.725) 4(0.5,0.725) 5(-0.5,0.725)
SC89_6P
  rect 0.305x0.864 smd: 1(-0.5,-0.725) 2(0,-0.725) 3(0.5,-0.725) 4(0.5,0.725) 5(0,0.725) 6(-0.5,0.725)
SMC_0402
  rect 0.635x0.508 smd: 1(-0.47,0) 2(0.47,0)
SMC_0805
  rect 1.016x1.27 smd: 1(-1.067,0) 2(1.067,0)
SMC_1206
  rect 1.194x1.524 smd: 1(-1.486,0) 2(1.486,0)
SMC_1210
  rect 1.27x2.54 smd: 1(-1.524,0) 2(1.524,0)
SMR_0402
  rect 0.635x0.508 smd: 1(-0.47,0) 2(0.47,0)
SMR_0603
  rect 0.889x0.762 smd: 1(-0.826,0) 2(0.826,0)
SOD323_BIDIR_12
  rect 1.27x0.711 smd: 1(-1.27,0) 2(1.27,0)
SOD_123_21
  rect 0.889x1.143 smd: 1(1.702,0) 2(-1.702,0)
SOIC8_197X157_050_EPAD
  rect 0.762x1.397 smd: 1(-1.905,-2.769) 2(-0.635,-2.769) 3(0.635,-2.769) 4(1.905,-2.769) 5(1.905,2.769) 6(0.635,2.769) 7(-0.635,2.769) 8(-1.905,2.769)
  rect 5.334x2.54 smd: 9(0,0)
SOIC16_R23W_R4L_R05LS
  rect 0.635x1.905 smd: 1(-4.445,-2.603) 2(-3.175,-2.603) 3(-1.905,-2.603) 4(-0.635,-2.603) 5(0.635,-2.603) 6(1.905,-2.603) 7(3.175,-2.603) 8(4.445,-2.603) 9(4.445,2.603) 10(3.175,2.603) 11(1.905,2.603) 12(0.635,2.603) 13(-0.635,2.603) 14(-1.905,2.603) 15(-3.175,2.603) 16(-4.445,2.603)
SOIC16_R41W_R41L_R050PTCH
  rect 0.635x2.032 smd: 1(-4.445,-4.699) 2(-3.175,-4.699) 3(-1.905,-4.699) 4(-0.635,-4.699) 5(0.635,-4.699) 6(1.905,-4.699) 7(3.175,-4.699) 8(4.445,-4.699) 9(4.445,4.699) 10(3.175,4.699) 11(1.905,4.699) 12(0.635,4.699) 13(-0.635,4.699) 14(-1.905,4.699) 15(-3.175,4.699) 16(-4.445,4.699)
SOT23_5P
  rect 0.686x1.016 smd: 1(-0.95,-1.143) 2(0,-1.143) 3(0.95,-1.143) 4(0.95,1.143) 5(-0.95,1.143)
SOT23_123
  rect 0.762x1.016 smd: 1(-0.953,-1.092) 2(0.953,-1.092) 3(0,1.092)
SOT23_321
  rect 0.762x1.016 smd: 1(0,1.092) 2(0.953,-1.092) 3(-0.953,-1.092)
SOT223_1234
  rect 1.219x2.235 smd: 1(-2.286,-3.099) 2(0,-3.099) 3(2.286,-3.099)
  rect 3.607x2.235 smd: 4(0,3.099)
SWX_CK_KSS221GLFS
  rect 1.702x3.708 smd: 1(-2.946,0) 2(2.946,0)
TP-018-RND
  round 0.457 smd: 1(0,0)
TP_031
  round 1.397 hole 0.787: 1(0,0)
TSOP54_22P3M10P3_P8MM
  oval 0.305x1.6 smd: 1(-10.4,-5.585) 2(-9.6,-5.585) 3(-8.8,-5.585) 4(-8,-5.585) 5(-7.2,-5.585) 6(-6.4,-5.585) 7(-5.6,-5.585) 8(-4.8,-5.585) 9(-4,-5.585) 10(-3.2,-5.585) 11(-2.4,-5.585) 12(-1.6,-5.585) 13(-0.8,-5.585) 14(0,-5.585) 15(0.8,-5.585) 16(1.6,-5.585) 17(2.4,-5.585) 18(3.2,-5.585) 19(4,-5.585) 20(4.8,-5.585) 21(5.6,-5.585) 22(6.4,-5.585) 23(7.2,-5.585) 24(8,-5.585) 25(8.8,-5.585) 26(9.6,-5.585) 27(10.4,-5.585) 28(10.4,5.585) 29(9.6,5.585) 30(8.8,5.585) 31(8,5.585) 32(7.2,5.585) 33(6.4,5.585) 34(5.6,5.585) 35(4.8,5.585) 36(4,5.585) 37(3.2,5.585) 38(2.4,5.585) 39(1.6,5.585) 40(0.8,5.585) 41(0,5.585) 42(-0.8,5.585) 43(-1.6,5.585) 44(-2.4,5.585) 45(-3.2,5.585) 46(-4,5.585) 47(-4.8,5.585) 48(-5.6,5.585) 49(-6.4,5.585) 50(-7.2,5.585) 51(-8,5.585) 52(-8.8,5.585) 53(-9.6,5.585) 54(-10.4,5.585)
unnamed
  round 5.994 hole 2.692: 1(0,0)
unnamed#2
  round 1.626 hole 1.651 unplated: (0,0)
unnamed#3
  round 1.016 smd: (0,0)
WSON8_6P1M8P1_P1R27_EP4P8M6P0
  rect 0.66x1.194 smd: 1(-1.905,-3.937) 2(-0.635,-3.937) 3(0.635,-3.937) 4(1.905,-3.937) 5(1.905,3.937) 6(0.635,3.937) 7(-0.635,3.937) 8(-1.905,3.937)
XTAL_CM200S
  rect 1.27x1.905 smd: (2.743,-1.6) (2.743,1.6) 1(-2.743,-1.6) 4(-2.743,1.6)
XTAL_HC49U_SM_R16H
  rect 5.588x2.032 smd: 1(0,0) 2(9.652,0)

## Nets
1V2: C10.1 C11.1 C12.2 C13.1 C82.2 R2.1 R58.1 R74.1 U3.7(VOUT) U13.K8(VDDUTMIC)
3.3V: C14.1 C16.1 C20.1 C21.1 C25.1 C26.2 C28.2 C40.1 C41.1 C46.2 C47.2 C48.2 C49.2 C50.2 C51.1 C52.2 C53.2 C54.2 C55.2 C56.2 C57.2 C58.2 C59.2 C60.2 C73.2 C74.1 C113.1 C114.1 D6.2(CATHODE2) J5.1 J7.1 J10.4 J12.1 J12.2 L3.2 R3.1 R6.2 R17.1 R18.1 R44.1 R45.1 R46.1 R47.1 R48.1 R49.1 R50.1 R52.1 R53.1 R54.1 R55.1 R57.1 R59.2 R61.1 R72.1 R75.2 R80.1 R82.2 R83.2 R91.1 U3.5(VIN) U4.5(VDD) U5.6(VCC) U6.8(VDD) U7.7(VDD) U7.11(VREF) U7.12(SVDD) U11.16(VCC) U12.1(VDD#1) U12.3(VDDQ#3) U12.9(VDDQ#9) U12.14(VDD#14) U12.27(VDD#27) U12.43(VDDQ#43) U12.49(VDDQ#49) U14.1(VDD#1) U14.3(VDDQ#3) U14.9(VDDQ#9) U14.14(VDD#14) U14.27(VDD#27) U14.43(VDDQ#43) U14.49(VDDQ#49) U22.6(VIO) U22.7(VDD) U24.16(VCC) U26.6(VCC)
3.3V_AUDIO: C96.1 C97.1 C98.2 C112.2 C125.2 C127.2 U21.2(VOUT1) U21.3(VOUT2) U22.13(VPA) U22.18(VCC) U23.12(VDD_12) U23.20(VDD_20)
4.7V: C15.1 D3.1(CATHODE) D7.1(CATHODE) Q1.3(DRAIN) R79.1 U2.1(VIN)
5.0V: C7.1 C8.1 C32.1 C33.1 D3.2(ANODE) J5.14 J5.15 J8.1 L1.2 L2.1 R1.2 R22.2 R24.2 R25.2 R27.2 R67.1 U9.5(VIN)
5V_B: D7.2(ANODE) J3.4 R7.1
5V_BU: C83.1 Q1.2(SOURCE) R7.2 R12.1 R20.2 U1.3(EN) U19.1(EN) U19.3(VIN)
5V_BU_ENABLE: Q2.1(GATE) R21.2 U13.B15(PD21/TCLK2)
12V: C4.1 C5.1 C6.1 C29.1 C38.1 D1.1(CATHODE) D2.2(CATHODE) R10.1 U1.2(VIN) U8.1(VIN) U10.1(VIN)
12V_BACKLIGHT: C30.1 Q5.2(SOURCE) R28.2 R31.2 U8.5(VOUT)
12V_IN: D1.2(ANODE) J1.1 R9.2
12V_PWR_LOSS: U4.1(OUT) U13.J4(FIQ/A25_CFRNW/PB10)
12V_SENSE: C19.1 D6.3(CATHODE1ANODE2) R10.2 R11.1 U4.3(V+) U13.T13(PA17/AD0XP)
GND: C4.2 C5.2 C6.2 C7.2 C8.2 C9.2 C10.2 C13.2 C14.2 C15.2 C16.2 C17.2 C19.2 C20.2 C21.2 C22.2 C23.2 C24.2 C25.2 C26.1 C27.2 C28.1 C29.2 C30.2 C31.2 C32.2 C33.2 C34.2 C35.2 C38.2 C39.2 C40.2 C41.2 C44.2 C45.2 C46.1 C47.1 C48.1 C49.1 C50.1 C51.2 C52.1 C53.1 C54.1 C55.1 C56.1 C57.1 C58.1 C59.1 C60.1 C61.1 C62.1 C63.1 C64.2 C65.2 C66.2 C67.2 C68.2 C69.1 C70.2 C71.1 C72.2 C73.1 C74.2 C75.2 C76.2 C77.1 C78.2 C79.1 C80.1 C81.1 C82.1 C83.2 C84.2 C85.1 C86.1 C87.1 C88.2 C89.1 C90.1 C91.1 C92.1 C93.2 C94.2 C95.1 C96.2 C97.2 C98.1 C103.2 C104.1 C105.1 C111.2 C112.1 C113.2 C114.2 C125.1 C126.1 C127.1 C128.2 C129.2 C130.2 D2.1(ANODE) D4.2(ANODE) D6.1(ANODE1) D12.1(ANODE) D14.1 D15.1 D16.1 D17.1 J1.2 J3.3 J5.4 J5.10 J5.11 J5.12 J6.1 J6.4 J6.10 J6.11 J6.12 J6.13 J6.19 J6.20 J6.27 J6.28 J6.29 J6.35 J6.42 J6.47 J7.2 J8.2 J10.3 J10.6 J10.11(CT) J12.4 J12.6 J12.8 J12.10 J12.12 J12.14 J12.16 J12.18 J12.20 J13.2 J14.5(GND) J14.G1 J14.G2 J15.1 Q2.2(SOURCE) Q3.2(SOURCE) Q4.2(SOURCE) Q6.2(SOURCE) R4.1 R5.2 R8.1 R11.2 R13.2 R19.1 R21.1 R23.1 R26.1 R33.1 R37.2 R38.2 R42.1 R62.2 R71.1 R77.2 R84.2 R88.1 R89.1 SW1.1 U1.7(GND) U1.9(PAD) U2.2(GND_2) U2.4(GND_4) U3.1(E\N\) U3.9(GND) U4.2(GND) U5.7(GND) U6.4(VSS) U7.6(DGND) U7.10(AGND) U7.15(EGND) U7.18(SGND) U8.2(GND) U9.2(GND) U10.2(GND) U11.15(GND) U12.6(VSSQ#6) U12.12(VSSQ#12) U12.28(VSS#28) U12.41(VSS#41) U12.46(VSSQ#46) U12.52(VSSQ#52) U12.54(VSS#54) U13.A6(GNDPLLB) U13.A8(GND_A8) U13.B8(GND_B8) U13.C3(GND_C3) U13.C4(GND_C4) U13.C7(GNDBU) U13.D3(GND_D3) U13.D4(GND_D4) U13.D11(GND_D11) U13.E1(GNDPLLA) U13.G1(GND_G1) U13.U17(GNDANA) U14.6(VSSQ#6) U14.12(VSSQ#12) U14.28(VSS#28) U14.41(VSS#41) U14.46(VSSQ#46) U14.52(VSSQ#52) U14.54(VSS#54) U15.2 U15.5 U16.2 U16.5 U17.2 U17.5 U18.2 U18.5 U19.2(GND) U20.2(GND) U21.5(GND) U21.7(PAD) U22.8(DGND) U22.12(PGND) U22.17(AGND) U22.21(PAD) U23.3(GND_3) U23.9(GND_9) U23.10(GND_10) U23.13(GND_13) U23.19(GND_19) U23.21(PAD) U24.15(GND) U25.2 U25.5 U26.7(GND)
VBATT: J3.6 R9.1
VDDBU: C76.1 J11.1 R70.1 R73.2 U19.4(VOUT)
A0: U12.15(DQML) U13.R1(NBS0/A0)
A1: U13.P3(NWR2/NBS2/A1) U14.15(DQML)
A2: U12.23(A0) U13.R2(A2) U14.23(A0)
A3: U12.24(A1) U13.T1(A3) U14.24(A1)
A4: U12.25(A2) U13.U1(A4) U14.25(A2)
A5: U12.26(A3) U13.T2(A5) U14.26(A3)
A6: U12.29(A4) U13.U2(A6) U14.29(A4)
A7: U12.30(A5) U13.R3(A7) U14.30(A5)
A8: U12.31(A6) U13.T3(A8) U14.31(A6)
A9: U12.32(A7) U13.U3(A9) U14.32(A7)
A10: U12.33(A8) U13.R4(A10) U14.33(A8)
A11: U12.34(A9) U13.P4(A11) U14.34(A9)
A12: TP32.1 U13.T4(A12)
A13: U12.35(A11) U13.U4(A13) U14.35(A11)
A14: U12.36(A12) U13.R5(A14) U14.36(A12)
A15: TP33.1 U13.P5(A15)
A18: TP11.1 U13.J3(A18/PB11)
A19: TP12.1 U13.J1(A19/PB12)
A20: TP13.1 U13.J2(A20/PB13)
A21: TP4.1 U13.F2(A21_NANDALE/PB2)
A22: TP5.1 U13.F4(A22_NANDCLE/PB3)
A23: TP15.1 U13.K1(PCK0/A23/PB14)
A24: TP16.1 U13.K2(ADTRG/A24/PB15)
AC97CK: TP31.1 U13.H16(PD2/AC97_CK/SCK1)
AC97FS: TP30.1 U13.J14(PD1/AC97_FS)
AC97RX: TP42.1 U13.H10(PD4/AC97_RX/RTS3)
AC97TX: TP41.1 U13.H17(PD3/AC97_TX/CTS3)
ANODE1: J6.48 R34.2
ANODE2: J6.50 R35.2
AUDIO_SCK: C128.1 R83.1 R87.2 U22.4(MC/SCL) U23.8(SCL)
AUDIO_SCKI_PCK1: U13.G14(PD12/PWM2/PCK1) U22.9(SCKI)
AUDIO_SDA: C129.1 R82.1 R86.2 U22.3(MD/SDA) U23.7(SDA)
B1: J6.14 U13.P15(LCDD3/LCDD1/PC9)
B2: J6.15 U13.P16(LCDD4/LCDD2/PC10)
B3: J6.16 U13.P17(LCDD5/LCDD3/PC11)
B4: J6.17 U13.N15(LCDD6/LCDD4/PC12)
B5: J6.18 U13.N14(LCDD7/LCDD5/PC13)
BA0: U12.20(BA0) U13.T5(BA0/A16) U14.20(BA0)
BA1: U12.21(BA1) U13.U5(BA1/A17) U14.21(BA1)
BACKLIGHT_EN: R29.2 U8.4(S\H\D\N\) U13.G15(PD11/TWCK1/TIOB2)
BUTTON: D5.2(C1) R6.1 R51.1 R76.1
CAS: U12.17(C\A\S\) U13.P6(C\A\S\) U14.17(C\A\S\)
CATHODE1: D12.2(CATHODE) J6.49 R36.2 R37.1 U9.3(FB)
CATHODE2: J6.51 R38.1
CFCE1: TP9.1 U13.H1(PWM0/CFE1/PB8)
CFCE2: TP10.1 U13.H2(PWM1/CFE2/PB9)
CFIOR_NBS1_NWR1: U12.39(DQMH) U13.D2(CFIOR/NBS1/NWR1)
CFIOW_NBS3_NWR3: U13.E4(CFIOW/NBS3/NWR3) U14.39(DQMH)
CFOE_NRD: TP47.1 U13.F1(CFOE/NRD)
CFWE_NWE_NWR0: TP48.1 U13.F3(CFWE/NWE/NWR0)
CTS0: TP25.1 U13.A15(PA10/CTS0/RK0)
D0: U12.2(DQ0) U13.R7(D0)
D1: U12.4(DQ1) U13.P7(D1)
D2: U12.5(DQ2) U13.T7(D2)
D3: U12.7(DQ3) U13.U7(D3)
D4: U12.8(DQ4) U13.T8(D4)
D5: U12.10(DQ5) U13.P9(D5)
D6: U12.11(DQ6) U13.R9(D6)
D7: U12.13(DQ7) U13.T9(D7)
D8: U12.42(DQ8) U13.P10(D8)
D9: U12.44(DQ9) U13.R10(D9)
D10: U12.45(DQ10) U13.T10(D10)
D11: U12.47(DQ11) U13.U9(D11)
D12: U12.48(DQ12) U13.U10(D12)
D13: U12.50(DQ13) U13.U11(D13)
D14: U12.51(DQ14) U13.T11(D14)
D15: U12.53(DQ15) U13.P11(D15)
D16: U13.K4(D16/PB16) U14.2(DQ0)
D17: U13.K3(D17/PB17) U14.4(DQ1)
D18: U13.L1(D18/PB18) U14.5(DQ2)
D19: U13.L2(D19/PB19) U14.7(DQ3)
D20: U13.L4(D20/PB20) U14.8(DQ4)
D21: U13.L3(D21/PB21) U14.10(DQ5)
D22: U13.M1(D22/PB22) U14.11(DQ6)
D23: U13.M2(D23/PB23) U14.13(DQ7)
D24: U13.M4(D24/PB24) U14.42(DQ8)
D25: U13.M3(D25/PB25) U14.44(DQ9)
D26: U13.N1(D26/PB26) U14.45(DQ10)
D27: U13.N2(D27/PB27) U14.47(DQ11)
D28: U13.N4(D28/PB28) U14.48(DQ12)
D29: U13.N3(D29/PB29) U14.50(DQ13)
D30: U13.P1(D30/PB30) U14.51(DQ14)
D31: U13.P2(D31/PB31) U14.53(DQ15)
DCLK: J6.9 U13.R16(LCDDOTCK/PC6)
DISP: J6.39 R43.2
DRXD: U11.12 U13.B13(PA21/DRXD) U24.12
DTMG: J6.5 U13.R17(LCDDEN/PC7)
DTXD: U11.11 U13.A13(PA22/DTXD/RF0) U24.11
G0: J6.21 U13.N17(LCDD11/LCDD7/PC15)
G1: J6.22 U13.M15(LCDD12/LCDD8/PC16)
G2: J6.23 U13.M14(LCDD13/LCDD9/PC17)
G3: J6.24 U13.M16(LCDD14/LCDD10/PC18)
G4: J6.25 U13.M17(LCDD15/LCDD11/PC19)
G5: J6.26 U13.L14(LCDD19/LCDD13/PC21)
GPAD4: J5.6 U13.U15(PD6/GPAD4)
HPSD_: R85.1 U13.A17(PD17/RI0)
HSINK0: D8.A1(ANODE1) D8.A3(ANODE3)
HSINK1: D9.A1(ANODE1) D9.A3(ANODE3)
HSINK2: D10.A1(ANODE1) D10.A3(ANODE3)
HSINK3: D11.A1(ANODE1) D11.A3(ANODE3)
HSYNC: J6.7 U13.R15(LCDHSYNC/PC5)
ICE_NRST: J13.1 R59.1 R60.1 U5.3(R\E\S\E\T\) U6.7(RST#) U13.A9(NRST) U26.3(R\E\S\E\T\)
ICE_NTRST: R56.1 U13.D7(NTRST)
ICE_NTRST2: J12.3 R53.2 R56.2
ICE_RTCK: J12.11 R57.2 U13.A10(RTCK)
ICE_TCK: J12.9 U13.C8(TCK) U15.6
ICE_TDI: J12.5 R54.2 U13.C9(TDI) U15.1
ICE_TDO: J12.13 U13.D9(TDO) U15.4
ICE_TMS: J12.7 R55.2 U13.B9(TMS) U15.3
JACK: R90.2 U13.U13(PA18/AD1XM/RTS1) U25.6
LCD_5V: C39.1 J6.2 J6.3 U10.5(VOUT)
LCD_5V_EN: R41.2 U10.4(S\H\D\N\) U13.G16(PD10/TWD1/TIOA2)
LCD_VCC: J6.41 R44.2
LED_CLK: J5.8 RN2.6
LED_LE: RN2.4 U13.H15(PD5/DTXD/PWM2)
LED_OE_: J5.5 U13.C15(PD18/PWM3)
LED_PWM: Q6.1(GATE) R32.2 R33.2 U9.4(EN)
LED_PWM1: Q3.1(GATE) R23.2 U13.E14(PD15/DTR0/PWM1)
LED_PWM2: Q4.1(GATE) R26.2 U13.D17(PD16/DCD0/PWM2)
LED_SDI: J5.7 RN2.7
LED_SDO: J5.2 RN2.8
MC_CDA: J10.2 R49.2 U13.F14(PA1/MC_CDA) U17.4
MC_CK: J10.5 U13.F16(PA2/MC_CK) U17.6
MC_DA0: J10.7 R50.2 U13.F15(PA0/MC_DA0) U16.6
MC_DA1: J10.8 R48.2 U13.F17(PA3/MC_DA1/TCLK0) U16.1
MC_DA2: J10.9 R47.2 U13.E17(PA4/MC_DA2/TIOA0) U16.3
MC_DA3: J10.1 R46.2 U13.E16(PA5/MC_DA3/TIOB0) U16.4
MISO: RN1.2 U5.8(SO) U6.2(SO) U13.B12(PA25/MISO) U26.8(SO)
MOSI: RN1.4 RN2.2 U5.1(SI) U6.5(SI) U13.A12(PA26/MOSI) U26.1(SI)
NCS0: TP44.1 U13.E3(NCS0)
NCS2: R51.2 U13.J15(PD0/NCS2)
NCS3: TP39.1 U13.H4(NCS3_NANDCS/PB6)
NCS5: TP45.1 U13.D16(PD13/NCS5/CFCS1/NPCS3)
NPCS0: J4.1 R14.1 U13.B11(PA28/NPCS0)
NPCS1_TS_SS: RN1.1 U13.H3(NPCS1/NCS4_CFCS0/PB7)
NPCS2: R93.1 U13.H14(PD8/NPCS2/PWM3) U26.4(C\S\)
NRESET: J6.6 R41.1
ON/OFF_EXT: D5.3(C2) J3.5
PA9: TP24.1 U13.B17(PA9/RTS0/RK1)
PA11: TP26.1 U13.C14(PA11/TXD1)
PA12: TP27.1 U13.D14(PA12/RXD1)
PA14: U13.A14(PA14/RXD2/RD1)
PA15: J10.10(CD) U13.D13(PA15/TD0/)
PA16: TP28.1 U13.C13(PA16/RD0)
PB0: TP1.1 U13.P13(TXD3/PB0)
PB1: TP2.1 U13.R14(RXD3/PB1)
PB4: TP6.1 U13.G4(NANDOE/PB4)
PB5: TP7.1 U13.G3(NANDWE/PB5)
PC0: TP17.1 U13.P12(TF0/PC0)
PC2: TP14.1 U13.T15(PWM0/LCDMOD/PC2)
PC8: TP8.1 U13.P14(LCDD2/LCDD0/PC8)
PC14: TP3.1 U13.N16(LCDD10/LCDD6/PC14)
PC26: TP18.1 U13.K16(LCDD18/PC26)
PC27: TP19.1 U13.K17(LCDD19/PC27)
PC28: TP20.1 U13.K10(LCDD20/PC28)
PC29: TP21.1 U13.J10(TIOA1/LCDD21/PC29)
PC30: TP22.1 U13.J16(TIOB1/LCDD22/PC30)
PC31: TP23.1 U13.J17(TCLK1/LCDD23/PC31)
PCI: R42.2 R43.1 U13.R13(LCDPWR/TK0/PC1)
PD9: TP43.1 U13.G17(PD9/SCK2/NPCS3)
PD14: TP46.1 U13.E15(PD14/DSR0/PWM0)
PD19: TP50.1 U13.B16(PD19/PCK0)
R1: J6.30 U13.L16(LCDD20/LCDD14/PC22)
R2: J6.31 U13.L17(LCDD21/LCDD15/PC23)
R3: J6.32 U13.K15(LCDD22/LCDD16/PC24)
R4: J6.33 U13.K14(LCDD23/LCDD17/PC25)
R5: J6.34 U13.L15(LCDD18/LCDD12/PC20)
RAS: U12.18(R\A\S\) U13.T6(R\A\S\) U14.18(R\A\S\)
RXD: U11.9 U13.C16(PA7/RXD0) U24.9
SDA10: U12.22(A10) U13.R6(SDA10) U14.22(A10)
SDCK: U12.38(CLK) U13.U8(SDCK) U14.38(CLK)
SDCKE: U12.37(CKE) U13.P8(SDCKE) U14.37(CKE)
SDCS_NCS1: R45.2 R52.2 U12.19(C\S\) U13.E2(SDCS/NCS1) U14.19(C\S\)
SDWE: U12.16(W\E\) U13.U6(S\D\W\E\) U14.16(W\E\)
SLEFT: J15.3 U23.14(LHP) U25.3
SPCK: RN1.3 RN2.3 U5.2(SCK) U6.6(SCK) U13.C11(PA27/SPCK) U26.2(SCK)
SRIGHT: J15.2 R89.2 U23.11(RHP) U25.1
SSC_TD1: U13.B14(PA13/TXD2/TD1) U22.5(DIN)
SSC_TF1: U13.A11(PA29/RTS2/TF1) U22.11(LRCK)
SSC_TK1: U13.D10(PA30/CTS2/TK1) U22.10(BCK)
TEMP: J5.3 U13.U16(PD7/GPAD5)
TEST: J6.40 T1.1
TS_INT_: R15.1 R18.2 U13.C10(PA31/NWAIT/IRQ)
TS_RST_: R16.1 R17.2 U13.A16(PD20/PCK1)
TWCK0: R87.1 U13.C12(PA24/TWCK0)
TWD0: R86.1 U13.D12(PA23/TWD0)
TXD: U11.10 U13.C17(PA6/TXD0) U24.10
U11_P1: C42.1 U11.1 U24.1
U11_P2: C44.1 U11.2(V+) U24.2(V+)
U11_P3: C42.2 U11.3 U24.3
U11_P4: C43.1 U11.4 U24.4
U11_P5: C43.2 U11.5 U24.5
U11_P6: C45.1 U11.6(V-) U24.6(V-)
U11_P13: J9.3 U11.13 U24.13
U11_P14: J9.1 U11.14 U24.14
UART_RX: J3.1 U11.8 U24.8
UART_TX: J3.2 U11.7 U24.7
USB_DM: J14.2(D-) R65.2 U13.B2(DHSDM) U18.1
USB_DP: J14.3(D+) R64.2 U13.A2(DHSDP) U18.3
USB_EN: U13.U14(PA20/AD3YM/SCK3) U20.4(EN)
USB_ID: R78.2 U13.D15(PA8/SCK0/RF1) U18.6
USB_OC_: R68.1 U13.T14(PA19/AD2YP/CTS1) U20.3(O\C\)
USB_PER_PWR: C75.1 R67.2 R68.2 R69.2 U20.5(IN)
VCTRL: C31.1 R29.1 R32.1 U13.T16(PWM1/LCDCC/PC3)
VSYNC: J6.8 U13.T17(LCDVSYNC/PC4)
X+: C27.1 RN3.3 U7.13(X+)
X-: C23.1 RN3.1 U7.16(X-)
XL: D14.2 J6.43 RN3.8
XR: D16.2 J6.45 RN3.6
Y+: C24.1 RN3.4 U7.14(Y+)
Y-: C22.1 RN3.2 U7.17(Y-)
YD: D15.2 J6.44 RN3.7
YU: D17.2 J6.46 RN3.5
N16808878: C1.2 D4.1(CATHODE) L1.1 U1.8(PH)
N16809016: C1.1 U1.1(BOOT)
N16992410: R1.1 R4.2 U1.5(VSENSE)
N17078856: R12.2 R13.1 U4.4(V-)
N17083767: Q1.1(GATE) Q2.3(DRAIN) R20.1
N17097992: C9.1 U1.4(SS)
N17099583: C17.1 C18.1 U1.6(COMP)
N17100026: C18.2 R8.2
N17105834: R3.2 U2.3(VOUT)
N17192108: R71.2 U13.B7(TST)
N17192122: R65.1 U13.A1(DFSDM)
N17192130: R64.1 U13.B1(DFSDP)
N17192134: C63.2 R62.1 U13.B3(VBG)
N17192146: C61.2 R58.2 U13.A3(VDDPLLB)
N17192169: C68.1 U13.A7(XOUT32) Y2.1(S1)
N17192174: C70.1 U13.B6(XIN32) Y2.4(S4)
N17192190: C65.1 R63.1 U13.D1(PLLRCA)
N17192210: C67.1 U13.A4(XIN) Y1.1(S1)
N17192212: C66.1 U13.A5(XOUT) Y1.2(S2)
N17192218: C62.2 R61.2 U13.C1(VDDPLLA)
N17192224: R72.2 R77.1 U13.D8(BMS)
N17192264: C69.2 C72.1 L3.1 R66.2 U13.T12(VDDANA)
N17192268: R73.1 R76.2 U13.C6(WKUP)
N17192300: C71.2 R66.1 U13.U12(ADVREF)
N17192571: TP54.1 U13.D5(SHDN)
N17192637: C77.2 R70.2 U13.C5(VDDBU)
N17193230: C78.1 C79.2 C80.2 C81.2 R74.2 U13.B10(VDDCORE_B10) U13.H8(VDDCORE_H8) U13.J8(VDDCORE_J8)
N17193792: J12.15 R60.2
N17256203: C11.2 C12.1 R2.2 R5.1 U3.10(FB)
N17256347: C2.1 U3.8(C1M)
N17256349: C2.2 U3.6(C1P)
N17256351: C3.1 U3.3(C2M)
N17256357: C3.2 U3.4(C2P)
N17294871: C84.1 C85.2 C86.2 C87.2 C88.1 C89.2 C90.2 C91.2 C92.2 R75.1 U13.C2(VDDUTMII) U13.G2(VDDIOM_G2) U13.H9(VDDIOP_H9) U13.J9(VDDIOP_J9) U13.K9(VDDIOP_K9) U13.R8(VDDIOM_R8) U13.R12(VDDIOM_R12)
N17308874: J5.9 RN2.5
N17333962: J11.2 U13.D6(JTAGSEL)
N17347111: Q5.1(GATE) R28.1 R30.2
N17347113: C34.1 C35.1 D13.2(CATHODE) Q5.3(DRAIN) R31.1 R34.1 R35.1 R36.1
N17347188: Q6.3(DRAIN) R30.1
N17373583: C93.1 C94.1 J14.1(5V) U20.1(OUT)
N17373645: J14.4(ID) R69.1 R78.1
N17377471: D8.C(CATHODE) D9.C(CATHODE) Q3.3(DRAIN)
N17377509: D10.C(CATHODE) D11.C(CATHODE) Q4.3(DRAIN)
N17377579: D8.A2(ANODE2) R22.1
N17377607: D9.A2(ANODE2) R24.1
N17377659: D10.A2(ANODE2) R25.1
N17377673: D11.A2(ANODE2) R27.1
N17400523: D13.1(ANODE) L2.2 U9.1(SW)
N17439482: J4.2 R14.2 R92.1 U5.4(C\S\)
N17498820: R15.2 U7.4(I\N\T\)
N17499074: RN1.8 U7.20(C\S\)
N17499117: RN1.7 U7.1(SDO)
N17499157: RN1.6 U7.2(SCLK)
N17499204: RN1.5 U7.3(SDI)
N17499559: R16.2 U7.5(R\S\T\)
N17502514: R19.2 U7.9(AUX)
N17504939: C64.1 R63.2
N17601363: C95.2 R79.2 TP55.1 U21.1(VIN) U21.6(STBY)
N17607331: C100.1 U22.14(HPOR/LOR)
N17607629: C99.1 U22.15(HPOL/LOL)
N17627841: D5.1(A) SW1.2
N17634137: C130.1 R85.2 R88.2 U23.6(S\D\)
N17636002: C126.2 U23.15(CPVSS_15) U23.16(CPVSS_16)
N17636321: C124.2 U23.18(CPP)
N17636360: C124.1 U23.17(CPN)
N17637776: C99.2 U23.1(LINM)
N17637815: C100.2 U23.5(RINM)
N17637849: C105.2 U23.4(RINP)
N17637885: C104.2 U23.2(LINP)
N17894499: J15.4 R90.1 R91.2
N17940214: C103.1 U21.4(NOISE)
N17947389: R80.2 U22.1(MODE)
N17952431: C111.1 U22.16(VCOM)
N17959569: C101.2 U22.20(AIN1L)
N17959615: C102.2 U22.19(AIN1R)
N17961080: R84.1 U22.2(MS/ADR)
N17971444: R92.2 R93.2 U6.1(CE#)
N1719595063: TP53.1 U13.B4(PLLRCB)

Pads without a net: C36 1 2; C37 1 2; C101 1; C102 1; J5 13; J6 36 37 38; J9 2; J10 12; J12 17 19; R39 1 2; R40 1 2; REFSST 1; RN2 1; U3 2; U5 5; U6 3; U7 8 19 21; U8 3; U10 3; U12 40; U13 B5 R11; U14 40; U17 1 3; U18 4; U19 5; U25 4; U26 5; UNK* 1; UNK*#2 1; UNK*#3 1

## Via types
v1: diameter 0.457, hole 0.203, TOP to BOTTOM, 756 vias
v2: diameter 0.559, hole 0.305, TOP to BOTTOM, 42 vias

## Routing (per net, layer and track width the routed paths; a pad name or vN(x,y) marks a point on that pad's centre or on a via; arc(x,y) is an arc through that point)
1V2: length 3.6
  TOP w0.381: R74.1 55.97,56.34 56.31,56.68 56.31,57.32 C82.2 57.24,57.4 v1(57.27,57.43) ; R58.1 v1(69.01,52.2)
  BOTTOM w0.203: U13.K8 v1(57.27,57.43)
  vias: v1(49.66,69.24) v1(50.26,68.64) v1(50.66,69.24) v1(51.26,68.64) v1(51.66,69.24)
3.3V: length 94.9
  TOP w0.203: U14.43 v1(63.12,23.29) ; U14.49 v1(67.92,23.29)
  TOP w0.254: U22.6 94.77,41.89 C113.1 ; C59.2 51.1,36.97 v1(51.12,36.96) U14.27 ; U7.7 96.55,68.84 C28.2 v1(95.81,68.83) ; U7.12 99.92,71.67 C26.2 99.77,71.17 U7.11
  TOP w0.305: U22.6 U22.7
  TOP w0.381: R52.1 v1(56.69,21.5) ; U6.8 89.12,68.92 C21.1 v1(91.23,68.92) ; R72.1 v1(68.76,58.8) ; C25.1 v1(101.62,70.58) ; C25.1 v1(102.83,71.46) ; C25.1 101.58,71.5 C26.2 ; R46.1 v1(30.18,38.01) ; U14.14 v1(61.52,37.17) C57.2 ; C113.1 93.1,42 C114.1 v1(92.89,43.18) ; C51.1 34.85,46.23 35.23,46.61 v1(35.74,46.61) ; U14.9 65.52,36.98 v1(65.45,37.04) C58.2 ; v1(111.05,29.34) 111.55,29.85 R91.1 ; R54.1 15.88,26.96 v1(15.84,27.01) R53.1 ; C56.2 71.93,37 v1(71.92,36.98) U14.1 ; D6.2 v1(42.28,30.42) ; U4.5 38.85,30.65 C20.1 v1(37.91,30.72) ; U5.6 82.41,74.09 82.47,74.03 v1(82.54,74.03) ; R75.2 v1(41.66,57.83) ; R75.2 v1(42.39,58.56) ; R75.2 v1(42.39,57.03) ; J7.1 39.42,66.37 ; J7.1 38.45,65.4 ; J7.1 38.45,67.34 ; J7.1 37.49,66.37 ; R59.2 68.47,61.85 v1(68.76,62.14) ; R49.1 v1(30.18,42.7) ; R6.2 v1(117.27,50.17) ; v1(63.12,23.29) 63.17,23.24 C54.2 ; R55.1 v1(20.96,26.96) ; U14.3 v1(70.32,36.98) 70.15,37.14 C60.2 ; R82.2 v1(106.47,33.11) R83.2 ; C40.1 v1(106.98,53.59) R44.1 ; R47.1 v1(30.18,36.01) ; J5.1 v1(55.92,81.02) ; R61.1 v1(63.55,47.75) ; R18.1 v1(93.01,66.04) ; R50.1 v1(37.95,54.03) ; R57.1 v1(23.58,26.96) ; R80.1 v1(99.49,45.85) ; R48.1 v1(37.97,55.83) ; R17.1 v1(94.96,66.84) ; C55.2 67.87,23.24 v1(67.92,23.29)
  L3_PWR w0.381: 37.49,66.37 J7.1 ; J7.1 38.45,65.4 ; J7.1 38.45,67.34 ; J7.1 39.42,66.37
  BOTTOM w0.203: U12.14 v1(61.52,23.24) ; U12.9 v1(65.52,23.31) ; U12.1 v1(71.92,23.25) ; U12.3 v1(70.32,23.24)
  BOTTOM w0.254: U12.27 51.1,24.5 v1(51.1,23.24) C46.2 ; R52.1 v1(56.69,21.5)
  BOTTOM w0.381: C48.2 65.58,23.24 v1(65.52,23.31) ; v1(70.32,23.24) 70.41,23.15 C52.2 ; C49.2 v1(63.04,37.25) 63.12,37.17 U12.43 ; v1(71.92,23.25) 71.93,23.24 C53.2 ; v1(35.74,46.61) 33.91,46.61 J10.4 ; U24.16 U11.16 86.66,33.3 C41.1 v1(87.69,35.22) ; C50.2 67.87,37.07 v1(67.92,37.02) U12.49 ; J12.2 v1(12.13,19.83) ; U26.6 v1(80.26,66.42) ; C47.2 v1(61.52,23.24) ; J12.1 v1(12.13,29.06)
  vias: v1(17.32,14.48) v1(17.32,13.72) v1(17.32,12.95) v1(17.83,14.1) v1(17.83,13.34) v1(17.83,12.57) v1(39.66,67.44) v1(39.66,66.24) v1(40.06,66.84) v1(40.06,65.64) v1(40.46,67.44) v1(40.46,66.24) v1(40.86,66.84) v1(40.86,65.64)
3.3V_AUDIO: length 8.8
  TOP w0.254: C112.2 101.27,40.64 v1(101.01,40.89) U22.18 ; v1(110.58,35.47) C127.2 110.57,36.08 U23.12 ; U23.20 106.24,39.14 C125.2 v1(105.5,40.6) ; U22.13 v1(97.97,37.97)
  TOP w0.381: C98.2 101.98,40.68 C112.2
  vias: v1(105.97,47.12) v1(106.73,47.12) v1(107.49,47.12) v1(108.25,47.12)
4.7V: length 8
  TOP w0.381: v1(108.8,48.6) R79.1 v1(109.52,49.53) ; D7.1 77.34,4.19 v1(78.28,4.19) ; D7.1 76.58,3.35 77.14,2.79 v1(78.28,2.79) ; D7.1 76.58,5.62 Q1.3
  vias: v1(28.88,9.91) v1(28.88,9.14) v1(28.88,8.38) v1(29.51,10.29) v1(29.51,9.53) v1(29.51,8.76) v1(29.51,8)
5.0V: length 15.6
  TOP w0.381: J5.14 v1(68.92,81.62) ; R27.2 v1(10.78,40.87) ; J5.15 v1(69.92,81.64) ; R67.1 v1(21.17,8.55) ; R22.2 v1(10.78,49.89) ; R24.2 v1(11.73,55.5) ; R25.2 v1(10.78,48.17)
  L3_PWR w0.381: J8.1 23.37,3.43 ; J8.1 22.4,2.46 ; J8.1 22.4,4.39 ; J8.1 21.43,3.43
  BOTTOM w0.381: J8.1 23.37,3.43 ; J8.1 22.4,4.39 ; J8.1 22.4,2.46 ; J8.1 21.43,3.43
  vias: v1(21,3.81) v1(21,3.18) v1(21,2.54) v1(21,1.91) v1(80.69,63.12) v1(81.46,63.12) v1(82.22,63.12) v1(82.98,63.12) v1(83.74,63.12)
5V_B: length 1.5
  TOP w0.381: 68.3,6.97 J3.4 69.82,6.97
5V_BU: length 14.6
  TOP w0.254: U19.1 76.47,47.25 76.25,47.47 76.25,48.03 76.47,48.25 U19.3 78.62,48.25 C83.1
  TOP w0.381: v1(76.16,10.12) R20.2 76.16,8.34 Q1.2 ; R7.2 v1(74.22,9.66) ; v1(78.69,46.42) 78.69,47.02 79.12,47.46 C83.1 79.16,47.75 79.69,47.22 v1(79.69,46.42) ; R12.1 v1(39.93,32.51)
  BOTTOM w0.381: v1(57.67,4.59) 57.07,4.59 56.58,5.08 ; v1(57.67,5.39) 57.07,5.39 56.76,5.08 56.58,5.08 ; 56.58,5.08 U1.3
5V_BU_ENABLE: length 79.8
  TOP w0.127: v1(75.99,12.19) 75.99,25.74 74.28,27.45 74.28,40.77 73.8,41.24 73.8,55.75 74.22,56.16 74.22,59.94 71.68,62.48 71.68,66.88 v1(72.08,67.29) ; Q2.1 v1(79.23,6.6) 79.49,6.86 82.1,6.86 R21.2
  BOTTOM w0.127: v1(79.23,6.6) 79.23,8.95 v1(75.99,12.19) ; v1(72.08,67.29) 72.07,67.27 72.04,67.27 71.88,67.44 66.85,67.44 65.58,66.17 65.58,64.26 65.16,63.84 64.48,63.84 64.07,63.43 U13.B15
12V: length 29.4
  TOP w0.381: U10.1 109.75,64.2 C38.1 ; C38.1 v1(109.9,63.25) ; C38.1 v1(110.63,64.05) ; R10.1 38.12,26.07 37.65,25.61 37.65,24.61 38.65,23.61 43.86,23.61 50.06,17.4 55.47,17.4 v1(57.87,15)
  vias: v1(61.9,12.83) v1(61.9,12.19) v1(61.9,11.56) v1(61.9,10.92) v1(61.9,10.29) v1(61.9,9.65) v1(87.55,54.61) v1(88.31,54.61)
12V_BACKLIGHT: length 9.7
  TOP w0.381: R31.2 84.12,49.15 83.16,50.11 Q5.2 83.17,50.48 84.12,51.44 84.12,53.94 R28.2 C30.1 85.39,54.19 U8.5
12V_IN: length 3.9
  BOTTOM w0.381: 61.31,18.03 62.28,18.03 ; 62.28,18.03 62.28,19 ; 62.28,18.03 62.28,17.07 ; 62.28,18.03 63.24,18.03
12V_PWR_LOSS: length 48.8
  TOP w0.127: U4.1 37.56,28.55 v1(36.65,28.55)
  L4_SIG w0.127: v1(36.45,51.03) 36.48,51.05 38.28,51.05 41.07,53.85 52.29,53.85 52.3,53.84 52.63,53.84 52.64,53.85 53.09,53.85 53.1,53.84 57.43,53.84 57.83,54.23 v1(58.07,54.23)
  BOTTOM w0.127: U13.J4 58.47,54.63 v1(58.07,54.23) ; v1(36.45,51.03) 36.45,49.43 36.65,49.23 v1(36.65,28.55)
12V_SENSE: length 60.6
  TOP w0.127: R10.2 38.79,24.76 39.04,24.51 42.34,24.51 43.23,25.4 43.23,27.3 D6.3 40.8,27.3 U4.3 ; U4.3 40.66,27.35 40.66,28.41 39.66,29.41 v1(39.66,29.81) ; U4.3 40.82,27.19 C19.1 40.74,26.07 R11.1
  BOTTOM w0.127: U13.T13 52.67,61.83 52.27,62.24 51.62,62.24 51.15,62.71 44.86,62.71 39.76,57.62 39.76,54.79 39.76,54.78 39.76,53.76 39.29,53.3 39.29,51.35 37.42,49.48 37.42,35.61 39.53,33.49 39.53,29.93 v1(39.66,29.81)
